# EAGLE board I2C_Breakout_Block-Panel-v10 (EAGLE 6.6.0), part 1 of 3
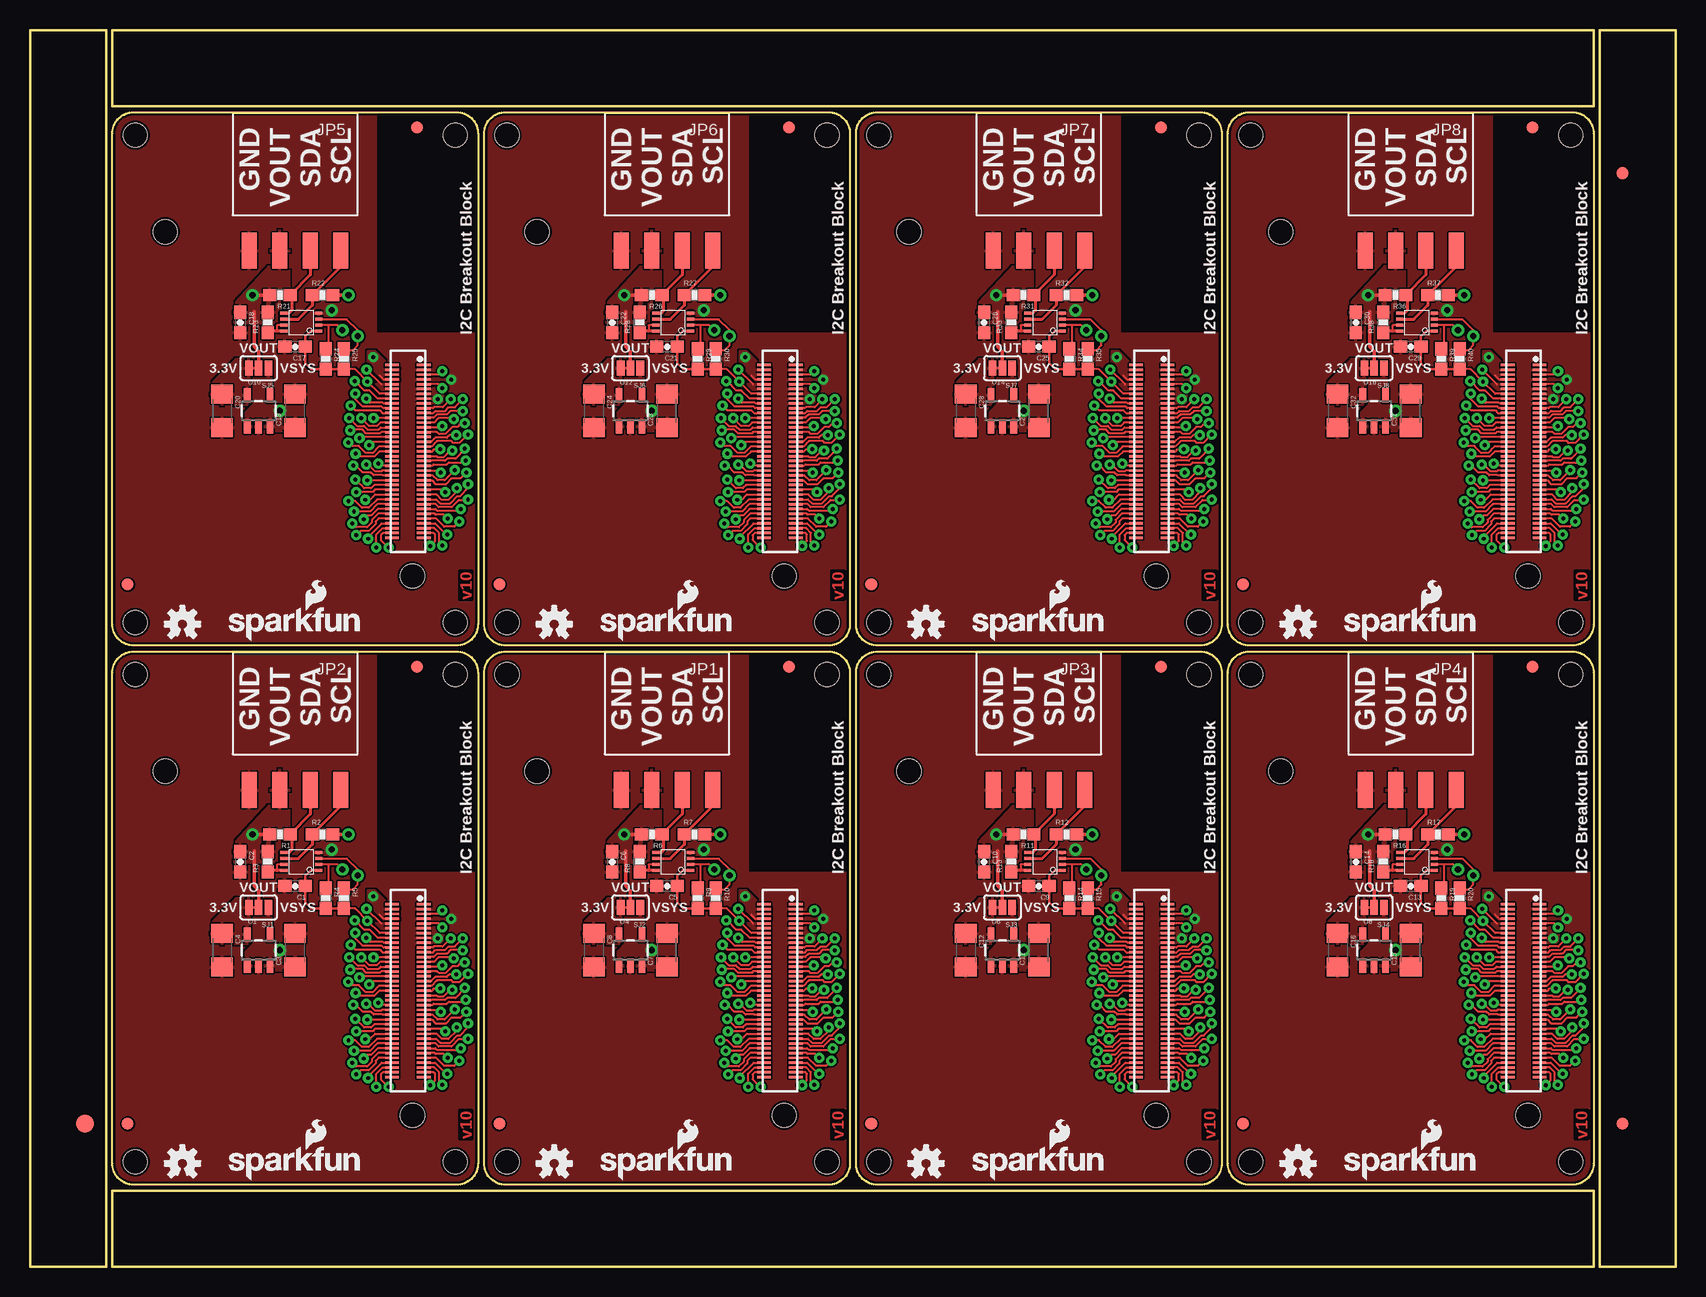
[diagram p0: board, top side]
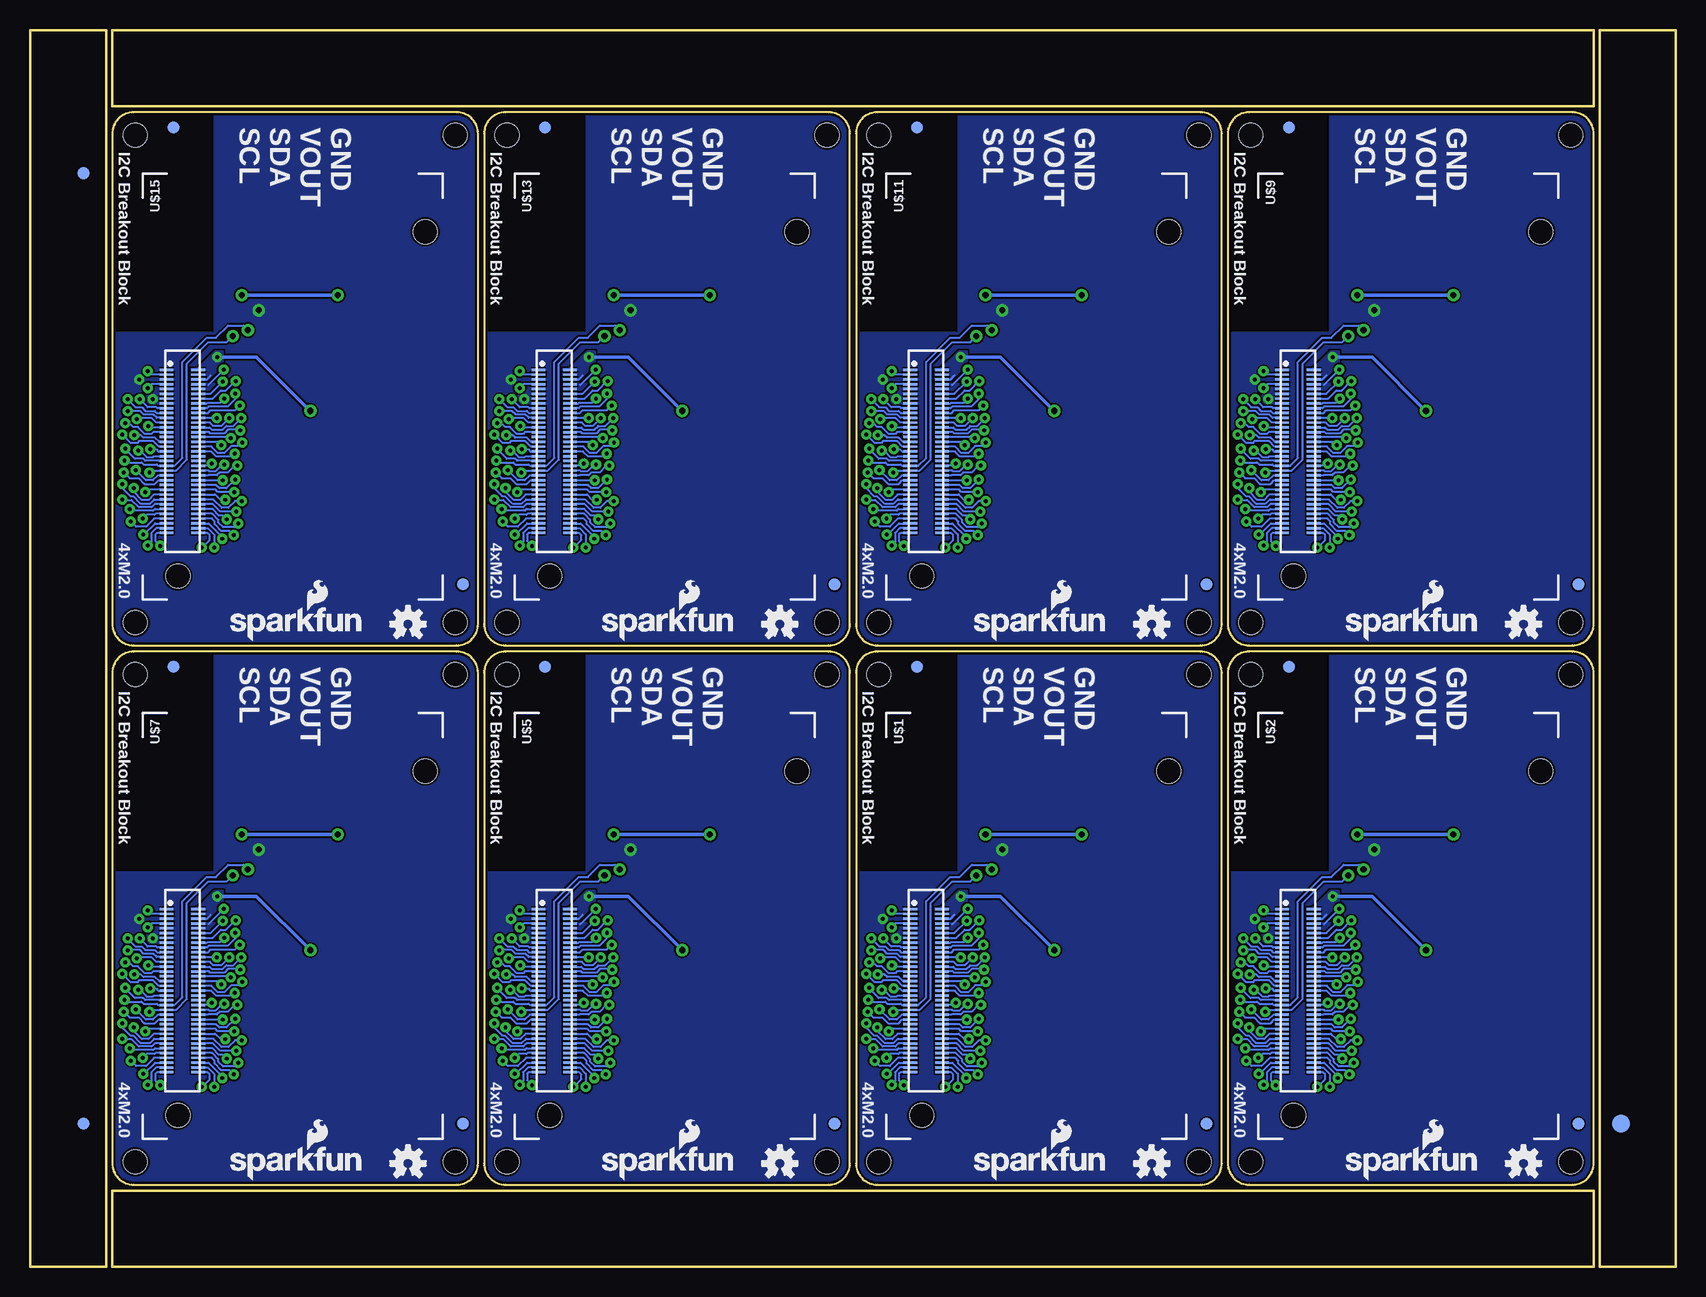
[diagram p1: board, bottom side, seen from below]

Size 137.16 x 103.12 mm. Coordinates in mm from the lower left corner, seen from the top.
Outline: 6.35,79.25 6.35,0 0,0 0,29.72
Outline: 137.16,79.25 137.16,0 130.81,0 130.81,29.72
Outline: 130.81,23.88 130.81,103.12 137.16,103.12 137.16,73.41
Outline: 0,23.88 0,103.12 6.35,103.12 6.35,73.41
Outline: 37.34,49.53 37.34,8.64 arc-90 35.56,6.86 8.64,6.86 arc-90 6.86,8.64 6.86,49.53 arc-90 8.64,51.31 35.56,51.31 arc-90 37.34,49.53
Outline: 68.33,49.53 68.33,8.64 arc-90 66.55,6.86 39.62,6.86 arc-90 37.85,8.64 37.85,49.53 arc-90 39.62,51.31 66.55,51.31 arc-90 68.33,49.53
Outline: 99.31,49.53 99.31,8.64 arc-90 97.54,6.86 70.61,6.86 arc-90 68.83,8.64 68.83,49.53 arc-90 70.61,51.31 97.54,51.31 arc-90 99.31,49.53
Outline: 130.3,49.53 130.3,8.64 arc-90 128.52,6.86 101.6,6.86 arc-90 99.82,8.64 99.82,49.53 arc-90 101.6,51.31 128.52,51.31 arc-90 130.3,49.53
Outline: 37.34,94.49 37.34,53.59 arc-90 35.56,51.82 8.64,51.82 arc-90 6.86,53.59 6.86,94.49 arc-90 8.64,96.27 35.56,96.27 arc-90 37.34,94.49
Outline: 68.33,94.49 68.33,53.59 arc-90 66.55,51.82 39.62,51.82 arc-90 37.85,53.59 37.85,94.49 arc-90 39.62,96.27 66.55,96.27 arc-90 68.33,94.49
Outline: 99.31,94.49 99.31,53.59 arc-90 97.54,51.82 70.61,51.82 arc-90 68.83,53.59 68.83,94.49 arc-90 70.61,96.27 97.54,96.27 arc-90 99.31,94.49
Outline: 130.3,94.49 130.3,53.59 arc-90 128.52,51.82 101.6,51.82 arc-90 99.82,53.59 99.82,94.49 arc-90 101.6,96.27 128.52,96.27 arc-90 130.3,94.49
Outline: 6.86,0 130.3,0 130.3,6.35 6.86,6.35 6.86,0
Outline: 130.3,103.12 6.86,103.12 6.86,96.77 130.3,96.77 130.3,103.12
Copper layers (1*16): Top 0.035mm / dielectric 1.5mm / Bottom 0.035mm
Design rules "SparkFun-2-layer *": minimum track width 6mil, minimum drill 13mil, track to track 6mil, track to pad 6mil, pad to pad 6mil, via to via 6mil, smd to smd 6mil, copper to edge 8mil, drill to drill 8mil, minimum pad ring 12mil, minimum via ring 10mil, stop-mask expansion 4mil, vias tented up to drill 20mil, thermal gap 6mil
Holes 2 mm at 35.43,8.76 8.76,8.76 8.76,49.4 35.43,49.4 66.42,8.76 39.75,8.76 39.75,49.4 66.42,49.4 97.41,8.76 70.74,8.76 70.74,49.4 97.41,49.4 128.4,8.76 101.73,8.76 101.73,49.4 128.4,49.4 35.43,53.72 8.76,53.72 8.76,94.36 35.43,94.36 66.42,53.72 39.75,53.72 39.75,94.36 66.42,94.36 97.41,53.72 70.74,53.72 70.74,94.36 97.41,94.36 128.4,53.72 101.73,53.72 101.73,94.36 128.4,94.36
tRestrict: area 29,33 to 37.3,51.3; area 59.9,33 to 68.3,51.3; area 90.9,33 to 99.3,51.3; area 121.9,33 to 130.3,51.3; area 29,78 to 37.3,96.3; area 59.9,78 to 68.3,96.3; area 90.9,78 to 99.3,96.3; area 121.9,78 to 130.3,96.3; 8 lines
bRestrict: area 29,33 to 37.3,51.3; area 59.9,33 to 68.3,51.3; area 90.9,33 to 99.3,51.3; area 121.9,33 to 130.3,51.3; area 29,78 to 37.3,96.3; area 59.9,78 to 68.3,96.3; area 90.9,78 to 99.3,96.3; area 121.9,78 to 130.3,96.3

## Footprints (pad centres in the part's own frame; a part is rotated, then mirrored left to right if it is on the bottom)
0603-CAP = smd 1.1 x 1: 1 -0.85,0; 2 0.85,0
1206 = smd 1.6 x 1.8: 1 -1.4,0; 2 1.4,0
FIDUCIAL-1.5X3 = smd 1.5 x 1.5: 1 0,0
FIDUCIAL-1X2 = smd 1 x 1: 1 0,0
1X04_SMD_RA_FEMALE = smd 1.25 x 3: 1 -3.81,7.225; 2 -1.27,7.225; 3 1.27,7.225; 4 3.81,7.225
0603-RES = smd 1.1 x 1: 1 -0.85,0; 2 0.85,0
PAD-JUMPER-3-2OF3_NC_BY_TRACE_YES_SILK_FULL_BOX = smd 0.635 x 1.27: 1 -0.813,0; 2 0,0; 3 0.813,0
SOT23-5 = smd 0.55 x 1.2: 1 -0.95,-1.3; 2 0,-1.3; 3 0.95,-1.3; 4 0.95,1.3; 5 -0.95,1.3
PCA9306DC-1:1 = smd 0.25 x 0.602: 1 -0.73,-1.446; 2 -0.23,-1.446; 3 0.27,-1.446; 4 0.77,-1.446; 5 0.77,1.431; 6 0.27,1.431; 7 -0.23,1.431; 8 -0.73,1.431
EDISON_DAUGHTER = smd 1.14 x 0.2: 1 1.98,19.17; 2 4.62,19.17; 3 1.98,18.77; 4 4.62,18.77; 5 1.98,18.37; 6 4.62,18.37; 7 1.98,17.97; 8 4.62,17.97; 9 1.98,17.57; 10 4.62,17.57; 11 1.98,17.17; 12 4.62,17.17; 13 1.98,16.77; 14 4.62,16.77; 15 1.98,16.37; 16 4.62,16.37; 17 1.98,15.97; 18 4.62,15.97; 19 1.98,15.57; 20 4.62,15.57; 21 1.98,15.17; 22 4.62,15.17; 23 1.98,14.77; 24 4.62,14.77; 25 1.98,14.37; 26 4.62,14.37; 27 1.98,13.97; 28 4.62,13.97; 29 1.98,13.57; 30 4.62,13.57; 31 1.98,13.17; 32 4.62,13.17; 33 1.98,12.77; 34 4.62,12.77; 35 1.98,12.37; 36 4.62,12.37; 37 1.98,11.97; 38 4.62,11.97; 39 1.98,11.57; 40 4.62,11.57; 41 1.98,11.17; 42 4.62,11.17; 43 1.98,10.77; 44 4.62,10.77; 45 1.98,10.37; 46 4.62,10.37; 47 1.98,9.97; 48 4.62,9.97; 49 1.98,9.57; 50 4.62,9.57; 51 1.98,9.17; 52 4.62,9.17; 53 1.98,8.77; 54 4.62,8.77; 55 1.98,8.37; 56 4.62,8.37; 57 1.98,7.97; 58 4.62,7.97; 59 1.98,7.57; 60 4.62,7.57; 61 1.98,7.17; 62 4.62,7.17; 63 1.98,6.77; 64 4.62,6.77; 65 1.98,6.37; 66 4.62,6.37; 67 1.98,5.97; 68 4.62,5.97; 69 1.98,5.57; 70 4.62,5.57 | hole 2: 23.53,30.67; 2.93,1.98
DF40C-70DP-0.4(51) = smd 0.2 x 1.14 bottom: 1 6.8,1.32; 2 6.8,-1.32; 3 6.4,1.32; 4 6.4,-1.32; 5 6,1.32; 6 6,-1.32; 7 5.6,1.32; 8 5.6,-1.32; 9 5.2,1.32; 10 5.2,-1.32; 11 4.8,1.32; 12 4.8,-1.32; 13 4.4,1.32; 14 4.4,-1.32; 15 4,1.32; 16 4,-1.32; 17 3.6,1.32; 18 3.6,-1.32; 19 3.2,1.32; 20 3.2,-1.32; 21 2.8,1.32; 22 2.8,-1.32; 23 2.4,1.32; 24 2.4,-1.32; 25 2,1.32; 26 2,-1.32; 27 1.6,1.32; 28 1.6,-1.32; 29 1.2,1.32; 30 1.2,-1.32; 31 0.8,1.32; 32 0.8,-1.32; 33 0.4,1.32; 34 0.4,-1.32; 35 0,1.32; 36 0,-1.32; 37 -0.4,1.32; 38 -0.4,-1.32; 39 -0.8,1.32; 40 -0.8,-1.32; 41 -1.2,1.32; 42 -1.2,-1.32; 43 -1.6,1.32; 44 -1.6,-1.32; 45 -2,1.32; 46 -2,-1.32; 47 -2.4,1.32; 48 -2.4,-1.32; 49 -2.8,1.32; 50 -2.8,-1.32; 51 -3.2,1.32; 52 -3.2,-1.32; 53 -3.6,1.32; 54 -3.6,-1.32; 55 -4,1.32; 56 -4,-1.32; 57 -4.4,1.32; 58 -4.4,-1.32; 59 -4.8,1.32; 60 -4.8,-1.32; 61 -5.2,1.32; 62 -5.2,-1.32; 63 -5.6,1.32; 64 -5.6,-1.32; 65 -6,1.32; 66 -6,-1.32; 67 -6.4,1.32; 68 -6.4,-1.32; 69 -6.8,1.32; 70 -6.8,-1.32; NC1 7.2,1.32; NC2 7.2,-1.32; NC3 -7.2,-1.32; NC4 -7.2,1.32

## Placement (x,y rotation side)
C1  0.1uF  [0603-CAP]  22.1,31.75 180 top
C2  0.1uF  [0603-CAP]  17.53,33.78 270 top
C3  10uF  [1206]  22.1,26.42 90 top
C4  10uF  [1206]  16,26.42 270 top
C5  0.1uF  [0603-CAP]  53.09,31.75 180 top
C6  0.1uF  [0603-CAP]  48.51,33.78 270 top
C7  10uF  [1206]  53.09,26.42 90 top
C8  10uF  [1206]  46.99,26.42 270 top
C9  0.1uF  [0603-CAP]  84.07,31.75 180 top
C10  0.1uF  [0603-CAP]  79.5,33.78 270 top
C11  10uF  [1206]  84.07,26.42 90 top
C12  10uF  [1206]  77.98,26.42 270 top
C13  0.1uF  [0603-CAP]  115.06,31.75 180 top
C14  0.1uF  [0603-CAP]  110.49,33.78 270 top
C15  10uF  [1206]  115.06,26.42 90 top
C16  10uF  [1206]  108.97,26.42 270 top
C17  0.1uF  [0603-CAP]  22.1,76.71 180 top
C18  0.1uF  [0603-CAP]  17.53,78.74 270 top
C19  10uF  [1206]  22.1,71.37 90 top
C20  10uF  [1206]  16,71.37 270 top
C21  0.1uF  [0603-CAP]  53.09,76.71 180 top
C22  0.1uF  [0603-CAP]  48.51,78.74 270 top
C23  10uF  [1206]  53.09,71.37 90 top
C24  10uF  [1206]  46.99,71.37 270 top
C25  0.1uF  [0603-CAP]  84.07,76.71 180 top
C26  0.1uF  [0603-CAP]  79.5,78.74 270 top
C27  10uF  [1206]  84.07,71.37 90 top
C28  10uF  [1206]  77.98,71.37 270 top
C29  0.1uF  [0603-CAP]  115.06,76.71 180 top
C30  0.1uF  [0603-CAP]  110.49,78.74 270 top
C31  10uF  [1206]  115.06,71.37 90 top
C32  10uF  [1206]  108.97,71.37 270 top
E$1  [FIDUCIAL-1.5X3]  4.57,11.94 0 top
E$2  [FIDUCIAL-1.5X3]  4.57,11.94 0 bottom
E$3  [FIDUCIAL-1X2]  132.72,91.19 180 bottom
E$4  [FIDUCIAL-1X2]  132.72,11.94 0 top
E$5  [FIDUCIAL-1X2]  132.72,91.19 180 top
E$6  [FIDUCIAL-1X2]  132.72,11.94 0 bottom
FID1  FIDUCIAL1X2  [FIDUCIAL-1X2]  32.26,50.04 0 bottom
FID2  FIDUCIAL1X2  [FIDUCIAL-1X2]  32.26,50.04 0 top
FID3  FIDUCIAL1X2  [FIDUCIAL-1X2]  8.13,11.94 0 bottom
FID4  FIDUCIAL1X2  [FIDUCIAL-1X2]  8.13,11.94 0 top
FID5  FIDUCIAL1X2  [FIDUCIAL-1X2]  63.25,50.04 0 bottom
FID6  FIDUCIAL1X2  [FIDUCIAL-1X2]  63.25,50.04 0 top
FID7  FIDUCIAL1X2  [FIDUCIAL-1X2]  39.12,11.94 0 bottom
FID8  FIDUCIAL1X2  [FIDUCIAL-1X2]  39.12,11.94 0 top
FID9  FIDUCIAL1X2  [FIDUCIAL-1X2]  94.23,50.04 0 bottom
FID10  FIDUCIAL1X2  [FIDUCIAL-1X2]  94.23,50.04 0 top
FID11  FIDUCIAL1X2  [FIDUCIAL-1X2]  70.1,11.94 0 bottom
FID12  FIDUCIAL1X2  [FIDUCIAL-1X2]  70.1,11.94 0 top
FID13  FIDUCIAL1X2  [FIDUCIAL-1X2]  125.22,50.04 0 bottom
FID14  FIDUCIAL1X2  [FIDUCIAL-1X2]  125.22,50.04 0 top
FID15  FIDUCIAL1X2  [FIDUCIAL-1X2]  101.09,11.94 0 bottom
FID16  FIDUCIAL1X2  [FIDUCIAL-1X2]  101.09,11.94 0 top
FID17  FIDUCIAL1X2  [FIDUCIAL-1X2]  32.26,95 0 bottom
FID18  FIDUCIAL1X2  [FIDUCIAL-1X2]  32.26,95 0 top
FID19  FIDUCIAL1X2  [FIDUCIAL-1X2]  8.13,56.9 0 bottom
FID20  FIDUCIAL1X2  [FIDUCIAL-1X2]  8.13,56.9 0 top
FID21  FIDUCIAL1X2  [FIDUCIAL-1X2]  63.25,95 0 bottom
FID22  FIDUCIAL1X2  [FIDUCIAL-1X2]  63.25,95 0 top
FID23  FIDUCIAL1X2  [FIDUCIAL-1X2]  39.12,56.9 0 bottom
FID24  FIDUCIAL1X2  [FIDUCIAL-1X2]  39.12,56.9 0 top
FID25  FIDUCIAL1X2  [FIDUCIAL-1X2]  94.23,95 0 bottom
FID26  FIDUCIAL1X2  [FIDUCIAL-1X2]  94.23,95 0 top
FID27  FIDUCIAL1X2  [FIDUCIAL-1X2]  70.1,56.9 0 bottom
FID28  FIDUCIAL1X2  [FIDUCIAL-1X2]  70.1,56.9 0 top
FID29  FIDUCIAL1X2  [FIDUCIAL-1X2]  125.22,95 0 bottom
FID30  FIDUCIAL1X2  [FIDUCIAL-1X2]  125.22,95 0 top
FID31  FIDUCIAL1X2  [FIDUCIAL-1X2]  101.09,56.9 0 bottom
FID32  FIDUCIAL1X2  [FIDUCIAL-1X2]  101.09,56.9 0 top
JP1  [1X04_SMD_RA_FEMALE]  53.09,46.99 180 top
JP2  [1X04_SMD_RA_FEMALE]  22.1,46.99 180 top
JP3  [1X04_SMD_RA_FEMALE]  84.07,46.99 180 top
JP4  [1X04_SMD_RA_FEMALE]  115.06,46.99 180 top
JP5  [1X04_SMD_RA_FEMALE]  22.1,91.95 180 top
JP6  [1X04_SMD_RA_FEMALE]  53.09,91.95 180 top
JP7  [1X04_SMD_RA_FEMALE]  84.07,91.95 180 top
JP8  [1X04_SMD_RA_FEMALE]  115.06,91.95 180 top
LOGO1  SFE_LOGO_NAME_FLAME.1_INCH  [SFE_LOGO_NAME_FLAME_.1]  16.13,7.11 0 top
LOGO2  OSHW-LOGOS  [OSHW-LOGO-S]  12.7,8.64 0 bottom
LOGO3  SFE_LOGO_NAME_FLAME.1_INCH  [SFE_LOGO_NAME_FLAME_.1]  27.94,7.11 0 bottom
LOGO4  OSHW-LOGOS  [OSHW-LOGO-S]  12.7,8.64 0 top
LOGO5  OSHW-LOGOS  [OSHW-LOGO-S]  43.69,8.64 0 bottom
LOGO6  SFE_LOGO_NAME_FLAME.1_INCH  [SFE_LOGO_NAME_FLAME_.1]  58.93,7.11 0 bottom
LOGO7  SFE_LOGO_NAME_FLAME.1_INCH  [SFE_LOGO_NAME_FLAME_.1]  47.12,7.11 0 top
LOGO8  OSHW-LOGOS  [OSHW-LOGO-S]  43.69,8.64 0 top
LOGO9  OSHW-LOGOS  [OSHW-LOGO-S]  74.68,8.64 0 bottom
LOGO10  SFE_LOGO_NAME_FLAME.1_INCH  [SFE_LOGO_NAME_FLAME_.1]  89.92,7.11 0 bottom
LOGO11  SFE_LOGO_NAME_FLAME.1_INCH  [SFE_LOGO_NAME_FLAME_.1]  78.11,7.11 0 top
LOGO12  OSHW-LOGOS  [OSHW-LOGO-S]  74.68,8.64 0 top
LOGO13  OSHW-LOGOS  [OSHW-LOGO-S]  105.66,8.64 0 bottom
LOGO14  SFE_LOGO_NAME_FLAME.1_INCH  [SFE_LOGO_NAME_FLAME_.1]  120.9,7.11 0 bottom
LOGO15  SFE_LOGO_NAME_FLAME.1_INCH  [SFE_LOGO_NAME_FLAME_.1]  109.09,7.11 0 top
LOGO16  OSHW-LOGOS  [OSHW-LOGO-S]  105.66,8.64 0 top
LOGO17  OSHW-LOGOS  [OSHW-LOGO-S]  12.7,53.59 0 bottom
LOGO18  SFE_LOGO_NAME_FLAME.1_INCH  [SFE_LOGO_NAME_FLAME_.1]  27.94,52.07 0 bottom
LOGO19  SFE_LOGO_NAME_FLAME.1_INCH  [SFE_LOGO_NAME_FLAME_.1]  16.13,52.07 0 top
LOGO20  OSHW-LOGOS  [OSHW-LOGO-S]  12.7,53.59 0 top
LOGO21  OSHW-LOGOS  [OSHW-LOGO-S]  43.69,53.59 0 bottom
LOGO22  SFE_LOGO_NAME_FLAME.1_INCH  [SFE_LOGO_NAME_FLAME_.1]  58.93,52.07 0 bottom
LOGO23  SFE_LOGO_NAME_FLAME.1_INCH  [SFE_LOGO_NAME_FLAME_.1]  47.12,52.07 0 top
LOGO24  OSHW-LOGOS  [OSHW-LOGO-S]  43.69,53.59 0 top
LOGO25  OSHW-LOGOS  [OSHW-LOGO-S]  74.68,53.59 0 bottom
LOGO26  SFE_LOGO_NAME_FLAME.1_INCH  [SFE_LOGO_NAME_FLAME_.1]  89.92,52.07 0 bottom
LOGO27  SFE_LOGO_NAME_FLAME.1_INCH  [SFE_LOGO_NAME_FLAME_.1]  78.11,52.07 0 top
LOGO28  OSHW-LOGOS  [OSHW-LOGO-S]  74.68,53.59 0 top
LOGO29  OSHW-LOGOS  [OSHW-LOGO-S]  105.66,53.59 0 bottom
LOGO30  SFE_LOGO_NAME_FLAME.1_INCH  [SFE_LOGO_NAME_FLAME_.1]  120.9,52.07 0 bottom
LOGO31  SFE_LOGO_NAME_FLAME.1_INCH  [SFE_LOGO_NAME_FLAME_.1]  109.09,52.07 0 top
LOGO32  OSHW-LOGOS  [OSHW-LOGO-S]  105.66,53.59 0 top
R1  10K  [0603-RES]  20.83,36.07 180 top
R2  10K  [0603-RES]  24.38,36.07 0 top
R3  200k  [0603-RES]  19.81,33.78 90 top
R4  DNP  [0603-RES]  24.64,30.73 270 top
R5  DNP  [0603-RES]  26.16,30.73 270 top
R6  10K  [0603-RES]  51.82,36.07 180 top
R7  10K  [0603-RES]  55.37,36.07 0 top
R8  200k  [0603-RES]  50.8,33.78 90 top
R9  DNP  [0603-RES]  55.63,30.73 270 top
R10  DNP  [0603-RES]  57.15,30.73 270 top
R11  10K  [0603-RES]  82.8,36.07 180 top
R12  10K  [0603-RES]  86.36,36.07 0 top
R13  200k  [0603-RES]  81.79,33.78 90 top
R14  DNP  [0603-RES]  86.61,30.73 270 top
R15  DNP  [0603-RES]  88.14,30.73 270 top
R16  10K  [0603-RES]  113.79,36.07 180 top
R17  10K  [0603-RES]  117.35,36.07 0 top
R18  200k  [0603-RES]  112.78,33.78 90 top
R19  DNP  [0603-RES]  117.6,30.73 270 top
R20  DNP  [0603-RES]  119.13,30.73 270 top
R21  10K  [0603-RES]  20.83,81.03 180 top
R22  10K  [0603-RES]  24.38,81.03 0 top
R23  200k  [0603-RES]  19.81,78.74 90 top
R24  DNP  [0603-RES]  24.64,75.69 270 top
R25  DNP  [0603-RES]  26.16,75.69 270 top
R26  10K  [0603-RES]  51.82,81.03 180 top
R27  10K  [0603-RES]  55.37,81.03 0 top
R28  200k  [0603-RES]  50.8,78.74 90 top
R29  DNP  [0603-RES]  55.63,75.69 270 top
R30  DNP  [0603-RES]  57.15,75.69 270 top
R31  10K  [0603-RES]  82.8,81.03 180 top
R32  10K  [0603-RES]  86.36,81.03 0 top
R33  200k  [0603-RES]  81.79,78.74 90 top
R34  DNP  [0603-RES]  86.61,75.69 270 top
R35  DNP  [0603-RES]  88.14,75.69 270 top
R36  10K  [0603-RES]  113.79,81.03 180 top
R37  10K  [0603-RES]  117.35,81.03 0 top
R38  200k  [0603-RES]  112.78,78.74 90 top
R39  DNP  [0603-RES]  117.6,75.69 270 top
R40  DNP  [0603-RES]  119.13,75.69 270 top
SJ1  Power Select  [PAD-JUMPER-3-2OF3_NC_BY_TRACE_YES_SILK_FULL_BOX]  19.05,29.97 180 top
SJ2  Power Select  [PAD-JUMPER-3-2OF3_NC_BY_TRACE_YES_SILK_FULL_BOX]  50.04,29.97 180 top
SJ3  Power Select  [PAD-JUMPER-3-2OF3_NC_BY_TRACE_YES_SILK_FULL_BOX]  81.03,29.97 180 top
SJ4  Power Select  [PAD-JUMPER-3-2OF3_NC_BY_TRACE_YES_SILK_FULL_BOX]  112.01,29.97 180 top
SJ5  Power Select  [PAD-JUMPER-3-2OF3_NC_BY_TRACE_YES_SILK_FULL_BOX]  19.05,74.93 180 top
SJ6  Power Select  [PAD-JUMPER-3-2OF3_NC_BY_TRACE_YES_SILK_FULL_BOX]  50.04,74.93 180 top
SJ7  Power Select  [PAD-JUMPER-3-2OF3_NC_BY_TRACE_YES_SILK_FULL_BOX]  81.03,74.93 180 top
SJ8  Power Select  [PAD-JUMPER-3-2OF3_NC_BY_TRACE_YES_SILK_FULL_BOX]  112.01,74.93 180 top
U1  MIC5205  [SOT23-5]  19.05,26.42 0 top
U2  PCA9306  [PCA9306DC-1:1]  22.61,33.78 90 top
U3  PCA9306  [PCA9306DC-1:1]  53.59,33.78 90 top
U4  MIC5205  [SOT23-5]  50.04,26.42 0 top
U5  PCA9306  [PCA9306DC-1:1]  84.58,33.78 90 top
U6  MIC5205  [SOT23-5]  81.03,26.42 0 top
U7  PCA9306  [PCA9306DC-1:1]  115.57,33.78 90 top
U8  MIC5205  [SOT23-5]  112.01,26.42 0 top
U9  PCA9306  [PCA9306DC-1:1]  22.61,78.74 90 top
U10  MIC5205  [SOT23-5]  19.05,71.37 0 top
U11  PCA9306  [PCA9306DC-1:1]  53.59,78.74 90 top
U12  MIC5205  [SOT23-5]  50.04,71.37 0 top
U13  PCA9306  [PCA9306DC-1:1]  84.58,78.74 90 top
U14  MIC5205  [SOT23-5]  81.03,71.37 0 top
U15  PCA9306  [PCA9306DC-1:1]  115.57,78.74 90 top
U16  MIC5205  [SOT23-5]  112.01,71.37 0 top
U$1  EDISON_CONNECTOR_FULLMOUNTING_HOLES  [EDISON_DAUGHTER]  65.79,10.67 0 bottom
U$2  EDISON_CONNECTOR_FULLMOUNTING_HOLES  [EDISON_DAUGHTER]  34.8,10.67 0 bottom
U$3  EDISON_CONNECTOR_FULLHEADER  [DF40C-70DP-0.4(51)]  31.5,23.04 90 bottom
U$4  EDISON_CONNECTOR_FULLHEADER  [DF40C-70DP-0.4(51)]  62.49,23.04 90 bottom
U$5  EDISON_CONNECTOR_FULLMOUNTING_HOLES  [EDISON_DAUGHTER]  96.77,10.67 0 bottom
U$6  EDISON_CONNECTOR_FULLHEADER  [DF40C-70DP-0.4(51)]  93.47,23.04 90 bottom
U$7  EDISON_CONNECTOR_FULLMOUNTING_HOLES  [EDISON_DAUGHTER]  127.76,10.67 0 bottom
U$8  EDISON_CONNECTOR_FULLHEADER  [DF40C-70DP-0.4(51)]  124.46,23.04 90 bottom
U$9  EDISON_CONNECTOR_FULLMOUNTING_HOLES  [EDISON_DAUGHTER]  34.8,55.63 0 bottom
U$10  EDISON_CONNECTOR_FULLHEADER  [DF40C-70DP-0.4(51)]  31.5,68 90 bottom
U$11  EDISON_CONNECTOR_FULLMOUNTING_HOLES  [EDISON_DAUGHTER]  65.79,55.63 0 bottom
U$12  EDISON_CONNECTOR_FULLHEADER  [DF40C-70DP-0.4(51)]  62.49,68 90 bottom
U$13  EDISON_CONNECTOR_FULLMOUNTING_HOLES  [EDISON_DAUGHTER]  96.77,55.63 0 bottom
U$14  EDISON_CONNECTOR_FULLHEADER  [DF40C-70DP-0.4(51)]  93.47,68 90 bottom
U$15  EDISON_CONNECTOR_FULLMOUNTING_HOLES  [EDISON_DAUGHTER]  127.76,55.63 0 bottom
U$16  EDISON_CONNECTOR_FULLHEADER  [DF40C-70DP-0.4(51)]  124.46,68 90 bottom

## Library data of the parts
C1 C2 C5 C6 C9 C10 C13 C14 C17 C18 C21 C22 C25 C26 C29 C30 = SparkFun-Capacitors; PROD_ID: CAP-00810
C3 C4 C7 C8 C11 C12 C15 C16 C19 C20 C23 C24 C27 C28 C31 C32 = SparkFun-Capacitors; PROD_ID: CAP-10057
E$1 E$2 = SparkFun-Retired
E$3-E$6 FID1-FID32 LOGO1-LOGO32 = SparkFun-Aesthetics
JP1-JP8 = SparkFun-Connectors
R1 R2 R6 R7 R11 R12 R16 R17 R21 R22 R26 R27 R31 R32 R36 R37 = SparkFun-Resistors; PROD_ID: RES-00824
R3 R8 R13 R18 R23 R28 R33 R38 = SparkFun-Resistors; PROD_ID: RES-09385
R4 R5 R9 R10 R14 R15 R19 R20 R24 R25 R29 R30 R34 R35 R39 R40 = SparkFun-Resistors; PROD_ID: RES-08272
SJ1-SJ8 = SparkFun-Passives
U1 U4 U6 U8 U10 U12 U14 U16 = SparkFun-PowerIC; PROD_ID: VREG-00822
U2 U3 U5 U7 U9 U11 U13 U15 = SparkFun-DigitalIC; PROD_ID: IC-10023
U$1-U$16 = Edison

## Nets
1.8V: C1.1 R4.2 R5.2 U2.1 U$2.12 U$3.12
1.8V1: C5.1 R9.2 R10.2 U3.1 U$1.12 U$4.12
1.8V2: C9.1 R14.2 R15.2 U5.1 U$5.12 U$6.12
1.8V3: C13.1 R19.2 R20.2 U7.1 U$7.12 U$8.12
1.8V4: C17.1 R24.2 R25.2 U9.1 U$9.12 U$10.12
1.8V5: C21.1 R29.2 R30.2 U11.1 U$11.12 U$12.12
1.8V6: C25.1 R34.2 R35.2 U13.1 U$13.12 U$14.12
1.8V7: C29.1 R39.2 R40.2 U15.1 U$15.12 U$16.12
3.3V: U$2.8 U$2.10 U$3.8 U$3.10
3.3V1: U$1.8 U$1.10 U$4.8 U$4.10
3.3V2: U$5.8 U$5.10 U$6.8 U$6.10
3.3V3: U$7.8 U$7.10 U$8.8 U$8.10
3.3V4: U$9.8 U$9.10 U$10.8 U$10.10
3.3V5: U$11.8 U$11.10 U$12.8 U$12.10
3.3V6: U$13.8 U$13.10 U$14.8 U$14.10
3.3V7: U$15.8 U$15.10 U$16.8 U$16.10
3.3V-REGULATED: C4.1 SJ1.3 U1.5
3.3V-REGULATED1: C8.1 SJ2.3 U4.5
3.3V-REGULATED2: C12.1 SJ3.3 U6.5
3.3V-REGULATED3: C16.1 SJ4.3 U8.5
3.3V-REGULATED4: C20.1 SJ5.3 U10.5
3.3V-REGULATED5: C24.1 SJ6.3 U12.5
3.3V-REGULATED6: C28.1 SJ7.3 U14.5
3.3V-REGULATED7: C32.1 SJ8.3 U16.5
DCIN: U$2.14 U$3.14
DCIN1: U$1.14 U$4.14
DCIN2: U$5.14 U$6.14
DCIN3: U$7.14 U$8.14
DCIN4: U$9.14 U$10.14
DCIN5: U$11.14 U$12.14
DCIN6: U$13.14 U$14.14
DCIN7: U$15.14 U$16.14
FAULT: U$2.19 U$3.19
FAULT1: U$1.19 U$4.19
FAULT2: U$5.19 U$6.19
FAULT3: U$7.19 U$8.19
FAULT4: U$9.19 U$10.19
FAULT5: U$11.19 U$12.19
FAULT6: U$13.19 U$14.19
FAULT7: U$15.19 U$16.19
FW_RCVR: U$2.69 U$3.69
FW_RCVR1: U$1.69 U$4.69
FW_RCVR2: U$5.69 U$6.69
FW_RCVR3: U$7.69 U$8.69
FW_RCVR4: U$9.69 U$10.69
FW_RCVR5: U$11.69 U$12.69
FW_RCVR6: U$13.69 U$14.69
FW_RCVR7: U$15.69 U$16.69
GND: C1.2 C2.2 C3.2 C4.2 JP2.4 U1.2 U2.4 U$2.1 U$2.5 U$2.9 U$2.11 U$2.13 U$2.15 U$3.1 U$3.5 U$3.9 U$3.11 U$3.13 U$3.15
GND1: C5.2 C6.2 C7.2 C8.2 JP1.4 U3.4 U4.2 U$1.1 U$1.5 U$1.9 U$1.11 U$1.13 U$1.15 U$4.1 U$4.5 U$4.9 U$4.11 U$4.13 U$4.15
GND2: C9.2 C10.2 C11.2 C12.2 JP3.4 U5.4 U6.2 U$5.1 U$5.5 U$5.9 U$5.11 U$5.13 U$5.15 U$6.1 U$6.5 U$6.9 U$6.11 U$6.13 U$6.15
GND3: C13.2 C14.2 C15.2 C16.2 JP4.4 U7.4 U8.2 U$7.1 U$7.5 U$7.9 U$7.11 U$7.13 U$7.15 U$8.1 U$8.5 U$8.9 U$8.11 U$8.13 U$8.15
GND4: C17.2 C18.2 C19.2 C20.2 JP5.4 U9.4 U10.2 U$9.1 U$9.5 U$9.9 U$9.11 U$9.13 U$9.15 U$10.1 U$10.5 U$10.9 U$10.11 U$10.13 U$10.15
GND5: C21.2 C22.2 C23.2 C24.2 JP6.4 U11.4 U12.2 U$11.1 U$11.5 U$11.9 U$11.11 U$11.13 U$11.15 U$12.1 U$12.5 U$12.9 U$12.11 U$12.13 U$12.15
GND6: C25.2 C26.2 C27.2 C28.2 JP7.4 U13.4 U14.2 U$13.1 U$13.5 U$13.9 U$13.11 U$13.13 U$13.15 U$14.1 U$14.5 U$14.9 U$14.11 U$14.13 U$14.15
GND7: C29.2 C30.2 C31.2 C32.2 JP8.4 U15.4 U16.2 U$15.1 U$15.5 U$15.9 U$15.11 U$15.13 U$15.15 U$16.1 U$16.5 U$16.9 U$16.11 U$16.13 U$16.15
GP1: U$1.48 U$4.48
GP2: U$1.42 U$4.42
GP3: U$1.34 U$4.34
GP4: U$1.32 U$4.32
GP5: U$1.30 U$4.30
GP6: U$1.28 U$4.28
GP7: U$1.26 U$4.26
GP8: U$1.25 U$4.25
GP9: U$1.24 U$4.24
GP10: U$5.48 U$6.48
GP11: U$5.42 U$6.42
GP12: U$5.34 U$6.34
GP12_PWM0: U$2.35 U$3.35
GP12_PWM1: U$1.35 U$4.35
GP12_PWM2: U$5.35 U$6.35
GP12_PWM3: U$7.35 U$8.35
GP12_PWM4: U$9.35 U$10.35
GP12_PWM5: U$11.35 U$12.35
GP12_PWM6: U$13.35 U$14.35
GP12_PWM7: U$15.35 U$16.35
GP13: U$5.32 U$6.32
GP13_PWM1: U$2.33 U$3.33
GP13_PWM2: U$1.33 U$4.33
GP13_PWM3: U$5.33 U$6.33
GP13_PWM4: U$7.33 U$8.33
GP13_PWM5: U$9.33 U$10.33
GP13_PWM6: U$11.33 U$12.33
GP13_PWM7: U$13.33 U$14.33
GP13_PWM8: U$15.33 U$16.33
GP14: U$2.48 U$3.48
GP15: U$2.42 U$3.42
GP16: U$5.30 U$6.30
GP17: U$5.28 U$6.28
GP18: U$5.26 U$6.26
GP19: U$5.25 U$6.25
GP19_I2C_1_SCL: R4.1 U2.2 U$2.41 U$3.41
GP19_I2C_1_SCL1: R9.1 U3.2 U$1.41 U$4.41
GP19_I2C_1_SCL2: R14.1 U5.2 U$5.41 U$6.41
GP19_I2C_1_SCL3: R19.1 U7.2 U$7.41 U$8.41
GP19_I2C_1_SCL4: R24.1 U9.2 U$9.41 U$10.41
GP19_I2C_1_SCL5: R29.1 U11.2 U$11.41 U$12.41
GP19_I2C_1_SCL6: R34.1 U13.2 U$13.41 U$14.41
GP19_I2C_1_SCL7: R39.1 U15.2 U$15.41 U$16.41
GP20: U$5.24 U$6.24
GP20_I2C_1_SDA: R5.1 U2.3 U$2.43 U$3.43
GP20_I2C_1_SDA1: R10.1 U3.3 U$1.43 U$4.43
GP20_I2C_1_SDA2: R15.1 U5.3 U$5.43 U$6.43
GP20_I2C_1_SDA3: R20.1 U7.3 U$7.43 U$8.43
GP20_I2C_1_SDA4: R25.1 U9.3 U$9.43 U$10.43
GP20_I2C_1_SDA5: R30.1 U11.3 U$11.43 U$12.43
GP20_I2C_1_SDA6: R35.1 U13.3 U$13.43 U$14.43
GP20_I2C_1_SDA7: R40.1 U15.3 U$15.43 U$16.43
GP21: U$7.48 U$8.48
GP22: U$7.42 U$8.42
GP23: U$7.34 U$8.34
GP24: U$7.32 U$8.32
GP25: U$7.30 U$8.30
GP26: U$7.28 U$8.28
GP27: U$7.26 U$8.26
GP27_I2C_6_SCL: U$2.45 U$3.45
GP27_I2C_6_SCL1: U$1.45 U$4.45
GP27_I2C_6_SCL2: U$5.45 U$6.45
GP27_I2C_6_SCL3: U$7.45 U$8.45
GP27_I2C_6_SCL4: U$9.45 U$10.45
GP27_I2C_6_SCL5: U$11.45 U$12.45
GP27_I2C_6_SCL6: U$13.45 U$14.45
GP27_I2C_6_SCL7: U$15.45 U$16.45
GP28: U$7.25 U$8.25
GP28_I2C_6_SDA: U$2.47 U$3.47
GP28_I2C_6_SDA1: U$1.47 U$4.47
GP28_I2C_6_SDA2: U$5.47 U$6.47
GP28_I2C_6_SDA3: U$7.47 U$8.47
GP28_I2C_6_SDA4: U$9.47 U$10.47
GP28_I2C_6_SDA5: U$11.47 U$12.47
GP28_I2C_6_SDA6: U$13.47 U$14.47
GP28_I2C_6_SDA7: U$15.47 U$16.47
GP29: U$7.24 U$8.24
GP30: U$9.48 U$10.48
GP31: U$9.42 U$10.42
GP32: U$9.34 U$10.34
GP33: U$9.32 U$10.32
GP34: U$9.30 U$10.30
GP35: U$9.28 U$10.28
GP36: U$9.26 U$10.26
GP37: U$9.25 U$10.25
GP38: U$9.24 U$10.24
GP39: U$11.48 U$12.48
GP40: U$11.42 U$12.42
GP40_I2S_2_CLK: U$2.52 U$3.52
GP40_I2S_2_CLK1: U$1.52 U$4.52
GP40_I2S_2_CLK2: U$5.52 U$6.52
GP40_I2S_2_CLK3: U$7.52 U$8.52
GP40_I2S_2_CLK4: U$9.52 U$10.52
GP40_I2S_2_CLK5: U$11.52 U$12.52
GP40_I2S_2_CLK6: U$13.52 U$14.52
GP40_I2S_2_CLK7: U$15.52 U$16.52
GP41: U$11.34 U$12.34
GP41_I2S_2_FS: U$2.54 U$3.54
GP41_I2S_2_FS1: U$1.54 U$4.54
GP41_I2S_2_FS2: U$5.54 U$6.54
GP41_I2S_2_FS3: U$7.54 U$8.54
GP41_I2S_2_FS4: U$9.54 U$10.54
GP41_I2S_2_FS5: U$11.54 U$12.54
GP41_I2S_2_FS6: U$13.54 U$14.54
GP41_I2S_2_FS7: U$15.54 U$16.54
GP42: U$11.32 U$12.32
GP42_I2S_2_RXD: U$2.50 U$3.50
GP42_I2S_2_RXD1: U$1.50 U$4.50
GP42_I2S_2_RXD2: U$5.50 U$6.50
GP42_I2S_2_RXD3: U$7.50 U$8.50
GP42_I2S_2_RXD4: U$9.50 U$10.50
GP42_I2S_2_RXD5: U$11.50 U$12.50
GP42_I2S_2_RXD6: U$13.50 U$14.50
GP42_I2S_2_RXD7: U$15.50 U$16.50
GP43: U$11.30 U$12.30
GP43_I2S_2_TXD: U$2.56 U$3.56
GP43_I2S_2_TXD1: U$1.56 U$4.56
GP43_I2S_2_TXD2: U$5.56 U$6.56
GP43_I2S_2_TXD3: U$7.56 U$8.56
GP43_I2S_2_TXD4: U$9.56 U$10.56
GP43_I2S_2_TXD5: U$11.56 U$12.56
GP43_I2S_2_TXD6: U$13.56 U$14.56
GP43_I2S_2_TXD7: U$15.56 U$16.56
GP44: U$2.24 U$3.24
GP45: U$2.26 U$3.26
GP46: U$2.28 U$3.28
GP47: U$2.30 U$3.30
GP48: U$2.32 U$3.32
GP49: U$2.34 U$3.34
GP50: U$11.28 U$12.28
GP51: U$11.26 U$12.26
GP52: U$11.25 U$12.25
GP53: U$11.24 U$12.24
GP54: U$13.48 U$14.48
GP55: U$13.42 U$14.42
GP56: U$13.34 U$14.34
GP57: U$13.32 U$14.32
GP58: U$13.30 U$14.30
GP59: U$13.28 U$14.28
GP60: U$13.26 U$14.26
GP61: U$13.25 U$14.25
GP62: U$13.24 U$14.24
GP63: U$15.48 U$16.48
GP64: U$15.42 U$16.42
GP65: U$15.34 U$16.34
GP66: U$15.32 U$16.32
GP67: U$15.30 U$16.30
GP68: U$15.28 U$16.28
GP69: U$15.26 U$16.26
GP70: U$15.25 U$16.25
GP71: U$15.24 U$16.24
GP77_SD_0_CD#: U$2.60 U$3.60
GP77_SD_0_CD#1: U$1.60 U$4.60
GP77_SD_0_CD#2: U$5.60 U$6.60
GP77_SD_0_CD#3: U$7.60 U$8.60
GP77_SD_0_CD#4: U$9.60 U$10.60
GP77_SD_0_CD#5: U$11.60 U$12.60
GP77_SD_0_CD#6: U$13.60 U$14.60
GP77_SD_0_CD#7: U$15.60 U$16.60
GP78_SD_0_CLK: U$2.58 U$3.58
GP78_SD_0_CLK1: U$1.58 U$4.58
GP78_SD_0_CLK2: U$5.58 U$6.58
GP78_SD_0_CLK3: U$7.58 U$8.58
GP78_SD_0_CLK4: U$9.58 U$10.58
GP78_SD_0_CLK5: U$11.58 U$12.58
GP78_SD_0_CLK6: U$13.58 U$14.58
GP78_SD_0_CLK7: U$15.58 U$16.58
GP79_SD_0_CMD: U$2.62 U$3.62
GP79_SD_0_CMD1: U$1.62 U$4.62
GP79_SD_0_CMD2: U$5.62 U$6.62
GP79_SD_0_CMD3: U$7.62 U$8.62
GP79_SD_0_CMD4: U$9.62 U$10.62
GP79_SD_0_CMD5: U$11.62 U$12.62
GP79_SD_0_CMD6: U$13.62 U$14.62
GP79_SD_0_CMD7: U$15.62 U$16.62
GP80_SD_0_DAT0: U$2.66 U$3.66
GP80_SD_0_DAT1: U$1.66 U$4.66
GP80_SD_0_DAT2: U$5.66 U$6.66
GP80_SD_0_DAT3: U$7.66 U$8.66
GP80_SD_0_DAT4: U$9.66 U$10.66
GP80_SD_0_DAT5: U$11.66 U$12.66
GP80_SD_0_DAT6: U$13.66 U$14.66
GP80_SD_0_DAT7: U$15.66 U$16.66
GP81_SD_0_DAT1: U$2.70 U$3.70
GP81_SD_0_DAT2: U$1.70 U$4.70
GP81_SD_0_DAT3: U$5.70 U$6.70
GP81_SD_0_DAT4: U$7.70 U$8.70
GP81_SD_0_DAT5: U$9.70 U$10.70
GP81_SD_0_DAT6: U$11.70 U$12.70
GP81_SD_0_DAT7: U$13.70 U$14.70
GP81_SD_0_DAT8: U$15.70 U$16.70
GP82_SD_0_DAT1: U$1.64 U$4.64
GP82_SD_0_DAT2: U$2.64 U$3.64
GP82_SD_0_DAT3: U$5.64 U$6.64
GP82_SD_0_DAT4: U$7.64 U$8.64
GP82_SD_0_DAT5: U$9.64 U$10.64
GP82_SD_0_DAT6: U$11.64 U$12.64
GP82_SD_0_DAT7: U$13.64 U$14.64
GP82_SD_0_DAT8: U$15.64 U$16.64
GP83_SD_0_DAT1: U$1.68 U$4.68
GP83_SD_0_DAT2: U$5.68 U$6.68
GP83_SD_0_DAT3: U$2.68 U$3.68
GP83_SD_0_DAT4: U$7.68 U$8.68
GP83_SD_0_DAT5: U$9.68 U$10.68
GP83_SD_0_DAT6: U$11.68 U$12.68
GP83_SD_0_DAT7: U$13.68 U$14.68
GP83_SD_0_DAT8: U$15.68 U$16.68
GP84_SD_CLK_FB: U$2.44 U$3.44
GP84_SD_CLK_FB1: U$1.44 U$4.44
GP84_SD_CLK_FB2: U$5.44 U$6.44
GP84_SD_CLK_FB3: U$7.44 U$8.44
GP84_SD_CLK_FB4: U$9.44 U$10.44
GP84_SD_CLK_FB5: U$11.44 U$12.44
GP84_SD_CLK_FB6: U$13.44 U$14.44
GP84_SD_CLK_FB7: U$15.44 U$16.44
GP109_SPI_2_CLK: U$2.55 U$3.55
GP109_SPI_2_CLK1: U$1.55 U$4.55
GP109_SPI_2_CLK2: U$5.55 U$6.55
GP109_SPI_2_CLK3: U$7.55 U$8.55
GP109_SPI_2_CLK4: U$9.55 U$10.55
GP109_SPI_2_CLK5: U$11.55 U$12.55
GP109_SPI_2_CLK6: U$13.55 U$14.55
GP109_SPI_2_CLK7: U$15.55 U$16.55
GP110_SPI_2_FS0: U$2.53 U$3.53
GP110_SPI_2_FS1: U$1.53 U$4.53
GP110_SPI_2_FS2: U$5.53 U$6.53
GP110_SPI_2_FS3: U$7.53 U$8.53
GP110_SPI_2_FS4: U$9.53 U$10.53
GP110_SPI_2_FS5: U$11.53 U$12.53
GP110_SPI_2_FS6: U$13.53 U$14.53
GP110_SPI_2_FS7: U$15.53 U$16.53
GP111_SPI_2_FS1: U$2.51 U$3.51
GP111_SPI_2_FS2: U$1.51 U$4.51
GP111_SPI_2_FS3: U$5.51 U$6.51
GP111_SPI_2_FS4: U$7.51 U$8.51
GP111_SPI_2_FS5: U$9.51 U$10.51
GP111_SPI_2_FS6: U$11.51 U$12.51
GP111_SPI_2_FS7: U$13.51 U$14.51
GP111_SPI_2_FS8: U$15.51 U$16.51
GP114_SPI_2_RXD: U$2.59 U$3.59
GP114_SPI_2_RXD1: U$1.59 U$4.59
GP114_SPI_2_RXD2: U$5.59 U$6.59
GP114_SPI_2_RXD3: U$7.59 U$8.59
GP114_SPI_2_RXD4: U$9.59 U$10.59
GP114_SPI_2_RXD5: U$11.59 U$12.59
GP114_SPI_2_RXD6: U$13.59 U$14.59
GP114_SPI_2_RXD7: U$15.59 U$16.59
GP115_SPI_2_TXD: U$2.57 U$3.57
GP115_SPI_2_TXD1: U$1.57 U$4.57
GP115_SPI_2_TXD2: U$5.57 U$6.57
GP115_SPI_2_TXD3: U$7.57 U$8.57
GP115_SPI_2_TXD4: U$9.57 U$10.57
GP115_SPI_2_TXD5: U$11.57 U$12.57
GP115_SPI_2_TXD6: U$13.57 U$14.57
GP115_SPI_2_TXD7: U$15.57 U$16.57
GP128_UART_1_CTS: U$2.65 U$3.65
GP128_UART_1_CTS1: U$1.65 U$4.65
GP128_UART_1_CTS2: U$5.65 U$6.65
GP128_UART_1_CTS3: U$7.65 U$8.65
GP128_UART_1_CTS4: U$9.65 U$10.65
GP128_UART_1_CTS5: U$11.65 U$12.65
GP128_UART_1_CTS6: U$13.65 U$14.65
GP128_UART_1_CTS7: U$15.65 U$16.65
GP129_UART_1_RTS: U$2.63 U$3.63
GP129_UART_1_RTS1: U$1.63 U$4.63
GP129_UART_1_RTS2: U$5.63 U$6.63
GP129_UART_1_RTS3: U$7.63 U$8.63
GP129_UART_1_RTS4: U$9.63 U$10.63
GP129_UART_1_RTS5: U$11.63 U$12.63
GP129_UART_1_RTS6: U$13.63 U$14.63
GP129_UART_1_RTS7: U$15.63 U$16.63
GP130_UART_1_RX: U$2.61 U$3.61
GP130_UART_1_RX1: U$1.61 U$4.61
GP130_UART_1_RX2: U$5.61 U$6.61
GP130_UART_1_RX3: U$7.61 U$8.61
GP130_UART_1_RX4: U$9.61 U$10.61
GP130_UART_1_RX5: U$11.61 U$12.61
GP130_UART_1_RX6: U$13.61 U$14.61
GP130_UART_1_RX7: U$15.61 U$16.61
GP131_UART_1_TX: U$2.46 U$3.46
GP131_UART_1_TX1: U$1.46 U$4.46
GP131_UART_1_TX2: U$5.46 U$6.46
GP131_UART_1_TX3: U$7.46 U$8.46
GP131_UART_1_TX4: U$9.46 U$10.46
GP131_UART_1_TX5: U$11.46 U$12.46
GP131_UART_1_TX6: U$13.46 U$14.46
GP131_UART_1_TX7: U$15.46 U$16.46
GP134_UART_2_RX: U$2.22 U$3.22
GP134_UART_2_RX1: U$1.22 U$4.22
GP134_UART_2_RX2: U$5.22 U$6.22
GP134_UART_2_RX3: U$7.22 U$8.22
GP134_UART_2_RX4: U$9.22 U$10.22
GP134_UART_2_RX5: U$11.22 U$12.22
GP134_UART_2_RX6: U$13.22 U$14.22
GP134_UART_2_RX7: U$15.22 U$16.22
GP135_UART_2_TX: U$2.27 U$3.27
GP135_UART_2_TX1: U$1.27 U$4.27
GP135_UART_2_TX2: U$5.27 U$6.27
GP135_UART_2_TX3: U$7.27 U$8.27
GP135_UART_2_TX4: U$9.27 U$10.27
GP135_UART_2_TX5: U$11.27 U$12.27
GP135_UART_2_TX6: U$13.27 U$14.27
GP135_UART_2_TX7: U$15.27 U$16.27
GP165: U$2.25 U$3.25
GP182_PWM1: U$1.37 U$4.37
GP182_PWM2: U$2.37 U$3.37
GP182_PWM3: U$5.37 U$6.37
GP182_PWM4: U$7.37 U$8.37
GP182_PWM5: U$9.37 U$10.37
GP182_PWM6: U$11.37 U$12.37
GP182_PWM7: U$13.37 U$14.37
GP182_PWM8: U$15.37 U$16.37
GP183_PWM1: U$1.39 U$4.39
GP183_PWM2: U$5.39 U$6.39
GP183_PWM3: U$2.39 U$3.39
GP183_PWM4: U$7.39 U$8.39
GP183_PWM5: U$9.39 U$10.39
GP183_PWM6: U$11.39 U$12.39
GP183_PWM7: U$13.39 U$14.39
GP183_PWM8: U$15.39 U$16.39
HV_SCL: JP2.1 R2.1 U2.6
HV_SCL1: JP1.1 R7.1 U3.6
HV_SCL2: JP3.1 R12.1 U5.6
HV_SCL3: JP4.1 R17.1 U7.6
HV_SCL4: JP5.1 R22.1 U9.6
HV_SCL5: JP6.1 R27.1 U11.6
HV_SCL6: JP7.1 R32.1 U13.6
HV_SCL7: JP8.1 R37.1 U15.6
HV_SDA: JP2.2 R1.1 U2.5
HV_SDA1: JP1.2 R6.1 U3.5
HV_SDA2: JP3.2 R11.1 U5.5
HV_SDA3: JP4.2 R16.1 U7.5
HV_SDA4: JP5.2 R21.1 U9.5
HV_SDA5: JP6.2 R26.1 U11.5
HV_SDA6: JP7.2 R31.1 U13.5
HV_SDA7: JP8.2 R36.1 U15.5
MSIC_SLP_CLK: U$2.7 U$3.7
MSIC_SLP_CLK1: U$1.7 U$4.7
MSIC_SLP_CLK2: U$5.7 U$6.7
MSIC_SLP_CLK3: U$7.7 U$8.7
MSIC_SLP_CLK4: U$9.7 U$10.7
MSIC_SLP_CLK5: U$11.7 U$12.7
MSIC_SLP_CLK6: U$13.7 U$14.7
MSIC_SLP_CLK7: U$15.7 U$16.7
N$1: R3.1 U2.7 U2.8
N$2: R8.1 U3.7 U3.8
N$3: R13.1 U5.7 U5.8
N$4: R18.1 U7.7 U7.8
N$5: R23.1 U9.7 U9.8
N$6: R28.1 U11.7 U11.8
N$7: R33.1 U13.7 U13.8
N$8: R38.1 U15.7 U15.8
OSC_CLK_OUT: U$2.67 U$3.67
OSC_CLK_OUT1: U$1.67 U$4.67
OSC_CLK_OUT2: U$5.67 U$6.67
OSC_CLK_OUT3: U$7.67 U$8.67
OSC_CLK_OUT4: U$9.67 U$10.67
OSC_CLK_OUT5: U$11.67 U$12.67
OSC_CLK_OUT6: U$13.67 U$14.67
OSC_CLK_OUT7: U$15.67 U$16.67
PSW: U$2.21 U$3.21
PSW1: U$1.21 U$4.21
PSW2: U$5.21 U$6.21
PSW3: U$7.21 U$8.21
PSW4: U$9.21 U$10.21
PSW5: U$11.21 U$12.21
PSW6: U$13.21 U$14.21
PSW7: U$15.21 U$16.21
PWRBTN#: U$2.17 U$3.17
PWRBTN#1: U$1.17 U$4.17
PWRBTN#2: U$5.17 U$6.17
PWRBTN#3: U$7.17 U$8.17
PWRBTN#4: U$9.17 U$10.17
PWRBTN#5: U$11.17 U$12.17
PWRBTN#6: U$13.17 U$14.17
PWRBTN#7: U$15.17 U$16.17
RCVR_MODE: U$2.31 U$3.31
RCVR_MODE1: U$1.31 U$4.31
RCVR_MODE2: U$5.31 U$6.31
RCVR_MODE3: U$7.31 U$8.31
RCVR_MODE4: U$9.31 U$10.31
RCVR_MODE5: U$11.31 U$12.31
RCVR_MODE6: U$13.31 U$14.31
RCVR_MODE7: U$15.31 U$16.31
RESET_OUT#: U$2.36 U$3.36
RESET_OUT#1: U$1.36 U$4.36
RESET_OUT#2: U$5.36 U$6.36
RESET_OUT#3: U$7.36 U$8.36
RESET_OUT#4: U$9.36 U$10.36
RESET_OUT#5: U$11.36 U$12.36
RESET_OUT#6: U$13.36 U$14.36
RESET_OUT#7: U$15.36 U$16.36
USB_DN: U$2.18 U$3.18
USB_DN1: U$1.18 U$4.18
USB_DN2: U$5.18 U$6.18
USB_DN3: U$7.18 U$8.18
USB_DN4: U$9.18 U$10.18
USB_DN5: U$11.18 U$12.18
USB_DN6: U$13.18 U$14.18
USB_DN7: U$15.18 U$16.18
USB_DP: U$2.16 U$3.16
USB_DP1: U$1.16 U$4.16
USB_DP2: U$5.16 U$6.16
USB_DP3: U$7.16 U$8.16
USB_DP4: U$9.16 U$10.16
USB_DP5: U$11.16 U$12.16
USB_DP6: U$13.16 U$14.16
USB_DP7: U$15.16 U$16.16
USB_ID: U$2.3 U$3.3
USB_ID1: U$1.3 U$4.3
USB_ID2: U$5.3 U$6.3
USB_ID3: U$7.3 U$8.3
USB_ID4: U$9.3 U$10.3
USB_ID5: U$11.3 U$12.3
USB_ID6: U$13.3 U$14.3
USB_ID7: U$15.3 U$16.3
USB_VBUS: U$2.20 U$3.20
USB_VBUS1: U$1.20 U$4.20
USB_VBUS2: U$5.20 U$6.20
USB_VBUS3: U$7.20 U$8.20
USB_VBUS4: U$9.20 U$10.20
USB_VBUS5: U$11.20 U$12.20
USB_VBUS6: U$13.20 U$14.20
USB_VBUS7: U$15.20 U$16.20
V_BAT_BKUP: U$2.23 U$3.23
V_BAT_BKUP1: U$1.23 U$4.23
V_BAT_BKUP2: U$5.23 U$6.23
V_BAT_BKUP3: U$7.23 U$8.23
V_BAT_BKUP4: U$9.23 U$10.23
V_BAT_BKUP5: U$11.23 U$12.23
V_BAT_BKUP6: U$13.23 U$14.23
V_BAT_BKUP7: U$15.23 U$16.23
VOUT: C2.1 JP2.3 R1.2 R2.2 R3.2 SJ1.2
VOUT1: C6.1 JP1.3 R6.2 R7.2 R8.2 SJ2.2
VOUT2: C10.1 JP3.3 R11.2 R12.2 R13.2 SJ3.2
VOUT3: C14.1 JP4.3 R16.2 R17.2 R18.2 SJ4.2
VOUT4: C18.1 JP5.3 R21.2 R22.2 R23.2 SJ5.2
VOUT5: C22.1 JP6.3 R26.2 R27.2 R28.2 SJ6.2
VOUT6: C26.1 JP7.3 R31.2 R32.2 R33.2 SJ7.2
VOUT7: C30.1 JP8.3 R36.2 R37.2 R38.2 SJ8.2
VSYS: C3.1 SJ1.1 U1.1 U1.3 U$2.2 U$2.4 U$2.6 U$3.2 U$3.4 U$3.6
VSYS1: C7.1 SJ2.1 U4.1 U4.3 U$1.2 U$1.4 U$1.6 U$4.2 U$4.4 U$4.6
VSYS2: C11.1 SJ3.1 U6.1 U6.3 U$5.2 U$5.4 U$5.6 U$6.2 U$6.4 U$6.6
VSYS3: C15.1 SJ4.1 U8.1 U8.3 U$7.2 U$7.4 U$7.6 U$8.2 U$8.4 U$8.6
VSYS4: C19.1 SJ5.1 U10.1 U10.3 U$9.2 U$9.4 U$9.6 U$10.2 U$10.4 U$10.6
VSYS5: C23.1 SJ6.1 U12.1 U12.3 U$11.2 U$11.4 U$11.6 U$12.2 U$12.4 U$12.6
VSYS6: C27.1 SJ7.1 U14.1 U14.3 U$13.2 U$13.4 U$13.6 U$14.2 U$14.4 U$14.6
VSYS7: C31.1 SJ8.1 U16.1 U16.3 U$15.2 U$15.4 U$15.6 U$16.2 U$16.4 U$16.6

## Tracks (layer width: path | path; a pad name or v marks a point on that pad's centre or on a via)
1.8V  (via drill 0.33)
  Top 0.152: U$3.12 29.13,27.84 v28.12,28.85 27.09,29.88 R5.2
  Top 0.203: U2.1 23.4,33.05 22.95,32.6 C1.1 22.95,30.39 23.46,29.88 R4.2 R5.2
  Bottom 0.152: U$3.12 29.13,27.84 v28.12,28.85
1.8V1  (via drill 0.33)
  Top 0.152: U$4.12 60.12,27.84 v59.11,28.85 58.08,29.88 R10.2
  Top 0.203: U3.1 54.39,33.05 53.94,32.6 C5.1 53.94,30.39 54.44,29.88 R9.2 R10.2
  Bottom 0.152: U$4.12 60.12,27.84 v59.11,28.85
1.8V2  (via drill 0.33)
  Top 0.152: U$6.12 91.11,27.84 v90.09,28.85 89.06,29.88 R15.2
  Top 0.203: U5.1 85.38,33.05 84.92,32.6 C9.1 84.92,30.39 85.43,29.88 R14.2 R15.2
  Bottom 0.152: U$6.12 91.11,27.84 v90.09,28.85
1.8V3  (via drill 0.33)
  Top 0.152: U$8.12 122.1,27.84 v121.08,28.85 120.05,29.88 R20.2
  Top 0.203: U7.1 116.36,33.05 115.91,32.6 C13.1 115.91,30.39 116.42,29.88 R19.2 R20.2
  Bottom 0.152: U$8.12 122.1,27.84 v121.08,28.85
1.8V4  (via drill 0.33)
  Top 0.152: U$10.12 29.13,72.8 v28.12,73.81 27.09,74.84 R25.2
  Top 0.203: U9.1 23.4,78.01 22.95,77.56 C17.1 22.95,75.35 23.46,74.84 R24.2 R25.2
  Bottom 0.152: U$10.12 29.13,72.8 v28.12,73.81
1.8V5  (via drill 0.33)
  Top 0.152: U$12.12 60.12,72.8 v59.11,73.81 58.08,74.84 R30.2
  Top 0.203: U11.1 54.39,78.01 53.94,77.56 C21.1 53.94,75.35 54.44,74.84 R29.2 R30.2
  Bottom 0.152: U$12.12 60.12,72.8 v59.11,73.81
1.8V6  (via drill 0.33)
  Top 0.152: U$14.12 91.11,72.8 v90.09,73.81 89.06,74.84 R35.2
  Top 0.203: U13.1 85.38,78.01 84.92,77.56 C25.1 84.92,75.35 85.43,74.84 R34.2 R35.2
  Bottom 0.152: U$14.12 91.11,72.8 v90.09,73.81
1.8V7  (via drill 0.33)
  Top 0.152: U$16.12 122.1,72.8 v121.08,73.81 120.05,74.84 R40.2
  Top 0.203: U15.1 116.36,78.01 115.91,77.56 C29.1 115.91,75.35 116.42,74.84 R39.2 R40.2
  Bottom 0.152: U$16.12 122.1,72.8 v121.08,73.81
3.3V  (via drill 0.33)
  Top 0.152: v28.04,29.87 29.27,28.64
  Bottom 0.152: 29.34,28.57 v28.04,29.87 | U$3.8
  pour Top (isolate 0.051): 28.83,28.7 30.61,28.7 30.61,28.07 28.83,28.07
  pour Bottom (isolate 0.051): 28.83,28.7 28.83,28.07 30.48,28.07 30.48,28.7
3.3V1  (via drill 0.33)
  Top 0.152: v59.03,29.87 60.26,28.64
  Bottom 0.152: 60.33,28.57 v59.03,29.87 | U$4.8
  pour Top (isolate 0.051): 59.82,28.7 61.59,28.7 61.59,28.07 59.82,28.07
  pour Bottom (isolate 0.051): 59.82,28.7 59.82,28.07 61.47,28.07 61.47,28.7
3.3V2  (via drill 0.33)
  Top 0.152: v90.02,29.87 91.25,28.64
  Bottom 0.152: 91.31,28.57 v90.02,29.87 | U$6.8
  pour Top (isolate 0.051): 90.81,28.7 92.58,28.7 92.58,28.07 90.81,28.07
  pour Bottom (isolate 0.051): 90.81,28.7 90.81,28.07 92.46,28.07 92.46,28.7
3.3V3  (via drill 0.33)
  Top 0.152: v121.01,29.87 122.24,28.64
  Bottom 0.152: 122.3,28.57 v121.01,29.87 | U$8.8
  pour Top (isolate 0.051): 121.79,28.7 123.57,28.7 123.57,28.07 121.79,28.07
  pour Bottom (isolate 0.051): 121.79,28.7 121.79,28.07 123.44,28.07 123.44,28.7
3.3V4  (via drill 0.33)
  Top 0.152: v28.04,74.83 29.27,73.6
  Bottom 0.152: 29.34,73.53 v28.04,74.83 | U$10.8
  pour Top (isolate 0.051): 28.83,73.66 30.61,73.66 30.61,73.03 28.83,73.03
  pour Bottom (isolate 0.051): 28.83,73.66 28.83,73.03 30.48,73.03 30.48,73.66
3.3V5  (via drill 0.33)
  Top 0.152: v59.03,74.83 60.26,73.6
  Bottom 0.152: 60.33,73.53 v59.03,74.83 | U$12.8
  pour Top (isolate 0.051): 59.82,73.66 61.59,73.66 61.59,73.03 59.82,73.03
  pour Bottom (isolate 0.051): 59.82,73.66 59.82,73.03 61.47,73.03 61.47,73.66
3.3V6  (via drill 0.33)
  Top 0.152: v90.02,74.83 91.25,73.6
  Bottom 0.152: 91.31,73.53 v90.02,74.83 | U$14.8
  pour Top (isolate 0.051): 90.81,73.66 92.58,73.66 92.58,73.03 90.81,73.03
  pour Bottom (isolate 0.051): 90.81,73.66 90.81,73.03 92.46,73.03 92.46,73.66
3.3V7  (via drill 0.33)
  Top 0.152: v121.01,74.83 122.24,73.6
  Bottom 0.152: 122.3,73.53 v121.01,74.83 | U$16.8
  pour Top (isolate 0.051): 121.79,73.66 123.57,73.66 123.57,73.03 121.79,73.03
  pour Bottom (isolate 0.051): 121.79,73.66 121.79,73.03 123.44,73.03 123.44,73.66
3.3V-REGULATED
  Top 0.203: 18,27.82 U1.5
  pour Top (rank 2): 18.41,26.92 15.11,26.92 15.11,28.7 17.14,30.73 18.54,30.73 18.54,27.05
3.3V-REGULATED1
  Top 0.203: 48.99,27.82 U4.5
  pour Top (rank 2): 49.4,26.92 46.1,26.92 46.1,28.7 48.13,30.73 49.53,30.73 49.53,27.05
3.3V-REGULATED2
  Top 0.203: 79.98,27.82 U6.5
  pour Top (rank 2): 80.39,26.92 77.09,26.92 77.09,28.7 79.12,30.73 80.52,30.73 80.52,27.05
3.3V-REGULATED3
  Top 0.203: 110.96,27.82 U8.5
  pour Top (rank 2): 111.38,26.92 108.08,26.92 108.08,28.7 110.11,30.73 111.51,30.73 111.51,27.05
3.3V-REGULATED4
  Top 0.203: 18,72.77 U10.5
  pour Top (rank 2): 18.41,71.88 15.11,71.88 15.11,73.66 17.14,75.69 18.54,75.69 18.54,72.01
3.3V-REGULATED5
  Top 0.203: 48.99,72.77 U12.5
  pour Top (rank 2): 49.4,71.88 46.1,71.88 46.1,73.66 48.13,75.69 49.53,75.69 49.53,72.01
3.3V-REGULATED6
  Top 0.203: 79.98,72.77 U14.5
  pour Top (rank 2): 80.39,71.88 77.09,71.88 77.09,73.66 79.12,75.69 80.52,75.69 80.52,72.01
3.3V-REGULATED7
  Top 0.203: 110.96,72.77 U16.5
  pour Top (rank 2): 111.38,71.88 108.08,71.88 108.08,73.66 110.11,75.69 111.51,75.69 111.51,72.01
DCIN  (via drill 0.33)
  Top 0.152: U$3.14 28.98,27.44 28.3,28.12 27.86,28.12 27.1,28.88 v27.05,28.88
  Bottom 0.152: U$3.14 28.98,27.44 28.3,28.12 27.86,28.12 27.1,28.88 v27.05,28.88
DCIN1  (via drill 0.33)
  Top 0.152: U$4.14 59.96,27.44 59.28,28.12 58.85,28.12 58.09,28.88 v58.04,28.88
  Bottom 0.152: U$4.14 59.96,27.44 59.28,28.12 58.85,28.12 58.09,28.88 v58.04,28.88
DCIN2  (via drill 0.33)
  Top 0.152: U$6.14 90.95,27.44 90.27,28.12 89.84,28.12 89.08,28.88 v89.03,28.88
  Bottom 0.152: U$6.14 90.95,27.44 90.27,28.12 89.84,28.12 89.08,28.88 v89.03,28.88
DCIN3  (via drill 0.33)
  Top 0.152: U$8.14 121.94,27.44 121.26,28.12 120.83,28.12 120.07,28.88 v120.02,28.88
  Bottom 0.152: U$8.14 121.94,27.44 121.26,28.12 120.83,28.12 120.07,28.88 v120.02,28.88
DCIN4  (via drill 0.33)
  Top 0.152: U$10.14 28.98,72.4 28.3,73.08 27.86,73.08 27.1,73.84 v27.05,73.84
  Bottom 0.152: U$10.14 28.98,72.4 28.3,73.08 27.86,73.08 27.1,73.84 v27.05,73.84
DCIN5  (via drill 0.33)
  Top 0.152: U$12.14 59.96,72.4 59.28,73.08 58.85,73.08 58.09,73.84 v58.04,73.84
  Bottom 0.152: U$12.14 59.96,72.4 59.28,73.08 58.85,73.08 58.09,73.84 v58.04,73.84
DCIN6  (via drill 0.33)
  Top 0.152: U$14.14 90.95,72.4 90.27,73.08 89.84,73.08 89.08,73.84 v89.03,73.84
  Bottom 0.152: U$14.14 90.95,72.4 90.27,73.08 89.84,73.08 89.08,73.84 v89.03,73.84
DCIN7  (via drill 0.33)
  Top 0.152: U$16.14 121.94,72.4 121.26,73.08 120.83,73.08 120.07,73.84 v120.02,73.84
  Bottom 0.152: U$16.14 121.94,72.4 121.26,73.08 120.83,73.08 120.07,73.84 v120.02,73.84
FAULT  (via drill 0.33)
  Top 0.152: U$3.19 33.6,26.24 33.78,26.42 34.59,26.42 34.9,26.72 35.41,26.72 v36.07,27.38
  Bottom 0.152: v36.07,27.38 35.41,26.72 34.9,26.72 34.59,26.42 33.78,26.42 33.6,26.24 U$3.19
FAULT1  (via drill 0.33)
  Top 0.152: U$4.19 64.59,26.24 64.77,26.42 65.58,26.42 65.89,26.72 66.4,26.72 v67.06,27.38
  Bottom 0.152: v67.06,27.38 66.4,26.72 65.89,26.72 65.58,26.42 64.77,26.42 64.59,26.24 U$4.19
FAULT2  (via drill 0.33)
  Top 0.152: U$6.19 95.58,26.24 95.76,26.42 96.57,26.42 96.88,26.72 97.38,26.72 v98.04,27.38
  Bottom 0.152: v98.04,27.38 97.38,26.72 96.88,26.72 96.57,26.42 95.76,26.42 95.58,26.24 U$6.19
FAULT3  (via drill 0.33)
  Top 0.152: U$8.19 126.57,26.24 126.75,26.42 127.56,26.42 127.86,26.72 128.37,26.72 v129.03,27.38
  Bottom 0.152: v129.03,27.38 128.37,26.72 127.86,26.72 127.56,26.42 126.75,26.42 126.57,26.24 U$8.19
FAULT4  (via drill 0.33)
  Top 0.152: U$10.19 33.6,71.2 33.78,71.37 34.59,71.37 34.9,71.68 35.41,71.68 v36.07,72.34
  Bottom 0.152: v36.07,72.34 35.41,71.68 34.9,71.68 34.59,71.37 33.78,71.37 33.6,71.2 U$10.19
FAULT5  (via drill 0.33)
  Top 0.152: U$12.19 64.59,71.2 64.77,71.37 65.58,71.37 65.89,71.68 66.4,71.68 v67.06,72.34
  Bottom 0.152: v67.06,72.34 66.4,71.68 65.89,71.68 65.58,71.37 64.77,71.37 64.59,71.2 U$12.19
FAULT6  (via drill 0.33)
  Top 0.152: U$14.19 95.58,71.2 95.76,71.37 96.57,71.37 96.88,71.68 97.38,71.68 v98.04,72.34
  Bottom 0.152: v98.04,72.34 97.38,71.68 96.88,71.68 96.57,71.37 95.76,71.37 95.58,71.2 U$14.19
FAULT7  (via drill 0.33)
  Top 0.152: U$16.19 126.57,71.2 126.75,71.37 127.56,71.37 127.86,71.68 128.37,71.68 v129.03,72.34
  Bottom 0.152: v129.03,72.34 128.37,71.68 127.86,71.68 127.56,71.37 126.75,71.37 126.57,71.2 U$16.19
FW_RCVR  (via drill 0.33)
  Top 0.152: v33.35,15.16 33.76,15.57 33.76,16.1 33.62,16.24 U$3.69
  Bottom 0.152: U$3.69 33.62,16.24 33.76,16.1 33.76,15.57 v33.35,15.16
FW_RCVR1  (via drill 0.33)
  Top 0.152: v64.34,15.16 64.75,15.57 64.75,16.1 64.61,16.24 U$4.69
  Bottom 0.152: U$4.69 64.61,16.24 64.75,16.1 64.75,15.57 v64.34,15.16
FW_RCVR2  (via drill 0.33)
  Top 0.152: v95.33,15.16 95.73,15.57 95.73,16.1 95.6,16.24 U$6.69
  Bottom 0.152: U$6.69 95.6,16.24 95.73,16.1 95.73,15.57 v95.33,15.16
FW_RCVR3  (via drill 0.33)
  Top 0.152: v126.31,15.16 126.72,15.57 126.72,16.1 126.59,16.24 U$8.69
  Bottom 0.152: U$8.69 126.59,16.24 126.72,16.1 126.72,15.57 v126.31,15.16
FW_RCVR4  (via drill 0.33)
  Top 0.152: v33.35,60.12 33.76,60.53 33.76,61.06 33.62,61.2 U$10.69
  Bottom 0.152: U$10.69 33.62,61.2 33.76,61.06 33.76,60.53 v33.35,60.12
FW_RCVR5  (via drill 0.33)
  Top 0.152: v64.34,60.12 64.75,60.53 64.75,61.06 64.61,61.2 U$12.69
  Bottom 0.152: U$12.69 64.61,61.2 64.75,61.06 64.75,60.53 v64.34,60.12
FW_RCVR6  (via drill 0.33)
  Top 0.152: v95.33,60.12 95.73,60.53 95.73,61.06 95.6,61.2 U$14.69
  Bottom 0.152: U$14.69 95.6,61.2 95.73,61.06 95.73,60.53 v95.33,60.12
FW_RCVR7  (via drill 0.33)
  Top 0.152: v126.31,60.12 126.72,60.53 126.72,61.06 126.59,61.2 U$16.69
  Bottom 0.152: U$16.69 126.59,61.2 126.72,61.06 126.72,60.53 v126.31,60.12
GND  (via drill 0.33, 0.51)
  other vias: 33.99,27.38 35.1,29.03 25.15,34.8
  pour Bottom (isolate 0.051, rank 6): 37.34,49.53 37.34,8.64 arc-90 35.56,6.86 8.64,6.86 arc-90 6.86,8.64 6.86,49.53 arc-90 8.64,51.31 35.56,51.31 arc-90
  pour Top (isolate 0.051, rank 6): 37.34,8.59 arc-90 35.61,6.86 8.64,6.86 arc-90 6.86,8.64 6.86,49.53 arc-90 8.64,51.31 35.56,51.31 arc-90 37.34,49.53
GND1  (via drill 0.33, 0.51)
  other vias: 64.97,27.38 66.09,29.03 56.13,34.8
  pour Bottom (isolate 0.051, rank 6): 68.33,49.53 68.33,8.64 arc-90 66.55,6.86 39.62,6.86 arc-90 37.85,8.64 37.85,49.53 arc-90 39.62,51.31 66.55,51.31 arc-90
  pour Top (isolate 0.051, rank 6): 68.33,8.59 arc-90 66.6,6.86 39.62,6.86 arc-90 37.85,8.64 37.85,49.53 arc-90 39.62,51.31 66.55,51.31 arc-90 68.33,49.53
GND2  (via drill 0.33, 0.51)
  other vias: 95.96,27.38 97.08,29.03 87.12,34.8
  pour Bottom (isolate 0.051, rank 6): 99.31,49.53 99.31,8.64 arc-90 97.54,6.86 70.61,6.86 arc-90 68.83,8.64 68.83,49.53 arc-90 70.61,51.31 97.54,51.31 arc-90
  pour Top (isolate 0.051, rank 6): 99.31,8.59 arc-90 97.59,6.86 70.61,6.86 arc-90 68.83,8.64 68.83,49.53 arc-90 70.61,51.31 97.54,51.31 arc-90 99.31,49.53
GND3  (via drill 0.33, 0.51)
  other vias: 126.95,27.38 128.07,29.03 118.11,34.8
  pour Bottom (isolate 0.051, rank 6): 130.3,49.53 130.3,8.64 arc-90 128.52,6.86 101.6,6.86 arc-90 99.82,8.64 99.82,49.53 arc-90 101.6,51.31 128.52,51.31 arc-90
  pour Top (isolate 0.051, rank 6): 130.3,8.59 arc-90 128.57,6.86 101.6,6.86 arc-90 99.82,8.64 99.82,49.53 arc-90 101.6,51.31 128.52,51.31 arc-90 130.3,49.53
GND4  (via drill 0.33, 0.51)
  other vias: 33.99,72.34 35.1,73.99 25.15,79.76
  pour Bottom (isolate 0.051, rank 6): 37.34,94.49 37.34,53.59 arc-90 35.56,51.82 8.64,51.82 arc-90 6.86,53.59 6.86,94.49 arc-90 8.64,96.27 35.56,96.27 arc-90
  pour Top (isolate 0.051, rank 6): 37.34,53.54 arc-90 35.61,51.82 8.64,51.82 arc-90 6.86,53.59 6.86,94.49 arc-90 8.64,96.27 35.56,96.27 arc-90 37.34,94.49
GND5  (via drill 0.33, 0.51)
  other vias: 64.97,72.34 66.09,73.99 56.13,79.76
  pour Bottom (isolate 0.051, rank 6): 68.33,94.49 68.33,53.59 arc-90 66.55,51.82 39.62,51.82 arc-90 37.85,53.59 37.85,94.49 arc-90 39.62,96.27 66.55,96.27 arc-90
  pour Top (isolate 0.051, rank 6): 68.33,53.54 arc-90 66.6,51.82 39.62,51.82 arc-90 37.85,53.59 37.85,94.49 arc-90 39.62,96.27 66.55,96.27 arc-90 68.33,94.49
GND6  (via drill 0.33, 0.51)
  other vias: 95.96,72.34 97.08,73.99 87.12,79.76
  pour Bottom (isolate 0.051, rank 6): 99.31,94.49 99.31,53.59 arc-90 97.54,51.82 70.61,51.82 arc-90 68.83,53.59 68.83,94.49 arc-90 70.61,96.27 97.54,96.27 arc-90
  pour Top (isolate 0.051, rank 6): 99.31,53.54 arc-90 97.59,51.82 70.61,51.82 arc-90 68.83,53.59 68.83,94.49 arc-90 70.61,96.27 97.54,96.27 arc-90 99.31,94.49
GND7  (via drill 0.33, 0.51)
  other vias: 126.95,72.34 128.07,73.99 118.11,79.76
  pour Bottom (isolate 0.051, rank 6): 130.3,94.49 130.3,53.59 arc-90 128.52,51.82 101.6,51.82 arc-90 99.82,53.59 99.82,94.49 arc-90 101.6,96.27 128.52,96.27 arc-90
  pour Top (isolate 0.051, rank 6): 130.3,53.54 arc-90 128.57,51.82 101.6,51.82 arc-90 99.82,53.59 99.82,94.49 arc-90 101.6,96.27 128.52,96.27 arc-90 130.3,94.49
GP1  (via drill 0.33)
  Top 0.152: v59.11,20.62 59.12,20.64 U$4.48
  Bottom 0.152: U$4.48 59.12,20.64 v59.11,20.62
GP2  (via drill 0.33)
  Top 0.152: U$4.42 60.2,21.84 v60.02,22.02
  Bottom 0.152: v60.02,22.02 60.2,21.84 U$4.42
GP3  (via drill 0.33)
  Top 0.152: U$4.34 60.06,23.44 59.54,22.91 58.98,22.91 58.4,23.5 57.78,23.5 v57.51,23.77
  Bottom 0.152: v57.51,23.77 57.78,23.5 58.4,23.5 58.98,22.91 59.54,22.91 60.06,23.44 U$4.34
GP4  (via drill 0.33)
  Top 0.152: v59.26,23.57 59.52,23.84 U$4.32
  Bottom 0.152: U$4.32 59.52,23.84 v59.26,23.57
GP5  (via drill 0.33)
  Top 0.152: U$4.30 60.28,24.24 60.27,24.23 58.52,24.23 v58.45,24.16
  Bottom 0.152: v58.45,24.16 58.52,24.23 60.27,24.23 60.28,24.24 U$4.30
GP6  (via drill 0.33)
  Top 0.152: U$4.28 60.25,24.64 60.15,24.54 59,24.54 58.7,24.84 57.71,24.84 v57.66,24.79
  Bottom 0.152: v57.66,24.79 57.71,24.84 58.7,24.84 59,24.54 60.15,24.54 60.25,24.64 U$4.28
GP7  (via drill 0.33)
  Top 0.152: v57.58,25.81 58.24,25.15 58.83,25.15 59.13,24.84 60.02,24.84 60.22,25.04 U$4.26
  Bottom 0.152: U$4.26 60.22,25.04 60.02,24.84 59.13,24.84 58.83,25.15 58.24,25.15 v57.58,25.81
GP8  (via drill 0.33)
  Top 0.152: v65.33,25.15 65.22,25.04 U$4.25
  Bottom 0.152: U$4.25 65.22,25.04 v65.33,25.15
GP9  (via drill 0.33)
  Top 0.152: U$4.24 60.19,25.44 59.89,25.15 59.26,25.15 v58.6,25.81
  Bottom 0.152: v58.6,25.81 59.26,25.15 59.89,25.15 60.19,25.44 U$4.24
GP10  (via drill 0.33)
  Top 0.152: v90.09,20.62 90.11,20.64 U$6.48
  Bottom 0.152: U$6.48 90.11,20.64 v90.09,20.62
GP11  (via drill 0.33)
  Top 0.152: U$6.42 91.19,21.84 v91.01,22.02
  Bottom 0.152: v91.01,22.02 91.19,21.84 U$6.42
GP12  (via drill 0.33)
  Top 0.152: U$6.34 91.05,23.44 90.53,22.91 89.97,22.91 89.38,23.5 88.77,23.5 v88.49,23.77
  Bottom 0.152: v88.49,23.77 88.77,23.5 89.38,23.5 89.97,22.91 90.53,22.91 91.05,23.44 U$6.34
GP12_PWM0  (via drill 0.33)
  Top 0.152: U$3.35 33.5,23.04 33.68,23.22 v34.19,23.22
  Bottom 0.152: v34.19,23.22 33.68,23.22 33.5,23.04 U$3.35 | U$3.35
GP12_PWM1  (via drill 0.33)
  Top 0.152: U$4.35 64.49,23.04 64.67,23.22 v65.18,23.22
  Bottom 0.152: v65.18,23.22 64.67,23.22 64.49,23.04 U$4.35 | U$4.35
GP12_PWM2  (via drill 0.33)
  Top 0.152: U$6.35 95.48,23.04 95.66,23.22 v96.16,23.22
  Bottom 0.152: v96.16,23.22 95.66,23.22 95.48,23.04 U$6.35 | U$6.35
GP12_PWM3  (via drill 0.33)
  Top 0.152: U$8.35 126.47,23.04 126.64,23.22 v127.15,23.22
  Bottom 0.152: v127.15,23.22 126.64,23.22 126.47,23.04 U$8.35 | U$8.35
GP12_PWM4  (via drill 0.33)
  Top 0.152: U$10.35 33.5,68 33.68,68.17 v34.19,68.17
  Bottom 0.152: v34.19,68.17 33.68,68.17 33.5,68 U$10.35 | U$10.35
GP12_PWM5  (via drill 0.33)
  Top 0.152: U$12.35 64.49,68 64.67,68.17 v65.18,68.17
  Bottom 0.152: v65.18,68.17 64.67,68.17 64.49,68 U$12.35 | U$12.35
GP12_PWM6  (via drill 0.33)
  Top 0.152: U$14.35 95.48,68 95.66,68.17 v96.16,68.17
  Bottom 0.152: v96.16,68.17 95.66,68.17 95.48,68 U$14.35 | U$14.35
GP12_PWM7  (via drill 0.33)
  Top 0.152: U$16.35 126.47,68 126.64,68.17 v127.15,68.17
  Bottom 0.152: v127.15,68.17 126.64,68.17 126.47,68 U$16.35 | U$16.35
GP13  (via drill 0.33)
  Top 0.152: v90.25,23.57 90.51,23.84 U$6.32
  Bottom 0.152: U$6.32 90.51,23.84 v90.25,23.57
GP13_PWM1  (via drill 0.33)
  Top 0.152: v36.5,24.43 36.47,24.43 35.79,23.75 35.26,23.75 35.13,23.88 33.91,23.88 33.47,23.44 U$3.33
  Bottom 0.152: U$3.33 33.47,23.44 33.91,23.88 35.13,23.88 35.26,23.75 35.79,23.75 36.47,24.43 v36.5,24.43
GP13_PWM2  (via drill 0.33)
  Top 0.152: v67.49,24.43 67.46,24.43 66.78,23.75 66.24,23.75 66.12,23.88 64.9,23.88 64.46,23.44 U$4.33
  Bottom 0.152: U$4.33 64.46,23.44 64.9,23.88 66.12,23.88 66.24,23.75 66.78,23.75 67.46,24.43 v67.49,24.43
GP13_PWM3  (via drill 0.33)
  Top 0.152: v98.48,24.43 98.45,24.43 97.77,23.75 97.23,23.75 97.1,23.88 95.89,23.88 95.45,23.44 U$6.33
  Bottom 0.152: U$6.33 95.45,23.44 95.89,23.88 97.1,23.88 97.23,23.75 97.77,23.75 98.45,24.43 v98.48,24.43
GP13_PWM4  (via drill 0.33)
  Top 0.152: v129.46,24.43 129.44,24.43 128.75,23.75 128.22,23.75 128.09,23.88 126.87,23.88 126.44,23.44 U$8.33
  Bottom 0.152: U$8.33 126.44,23.44 126.87,23.88 128.09,23.88 128.22,23.75 128.75,23.75 129.44,24.43 v129.46,24.43
GP13_PWM5  (via drill 0.33)
  Top 0.152: v36.5,69.39 36.47,69.39 35.79,68.71 35.26,68.71 35.13,68.83 33.91,68.83 33.47,68.4 U$10.33
  Bottom 0.152: U$10.33 33.47,68.4 33.91,68.83 35.13,68.83 35.26,68.71 35.79,68.71 36.47,69.39 v36.5,69.39
GP13_PWM6  (via drill 0.33)
  Top 0.152: v67.49,69.39 67.46,69.39 66.78,68.71 66.24,68.71 66.12,68.83 64.9,68.83 64.46,68.4 U$12.33
  Bottom 0.152: U$12.33 64.46,68.4 64.9,68.83 66.12,68.83 66.24,68.71 66.78,68.71 67.46,69.39 v67.49,69.39
GP13_PWM7  (via drill 0.33)
  Top 0.152: v98.48,69.39 98.45,69.39 97.77,68.71 97.23,68.71 97.1,68.83 95.89,68.83 95.45,68.4 U$14.33
  Bottom 0.152: U$14.33 95.45,68.4 95.89,68.83 97.1,68.83 97.23,68.71 97.77,68.71 98.45,69.39 v98.48,69.39
GP13_PWM8  (via drill 0.33)
  Top 0.152: v129.46,69.39 129.44,69.39 128.75,68.71 128.22,68.71 128.09,68.83 126.87,68.83 126.44,68.4 U$16.33
  Bottom 0.152: U$16.33 126.44,68.4 126.87,68.83 128.09,68.83 128.22,68.71 128.75,68.71 129.44,69.39 v129.46,69.39
GP14  (via drill 0.33)
  Top 0.152: v28.12,20.62 28.13,20.64 U$3.48
  Bottom 0.152: U$3.48 28.13,20.64 v28.12,20.62
GP15  (via drill 0.33)
  Top 0.152: U$3.42 29.22,21.84 v29.03,22.02
  Bottom 0.152: v29.03,22.02 29.22,21.84 U$3.42
GP16  (via drill 0.33)
  Top 0.152: U$6.30 91.27,24.24 91.26,24.23 89.51,24.23 v89.43,24.16
  Bottom 0.152: v89.43,24.16 89.51,24.23 91.26,24.23 91.27,24.24 U$6.30
GP17  (via drill 0.33)
  Top 0.152: U$6.28 91.24,24.64 91.14,24.54 89.99,24.54 89.69,24.84 88.7,24.84 v88.65,24.79
  Bottom 0.152: v88.65,24.79 88.7,24.84 89.69,24.84 89.99,24.54 91.14,24.54 91.24,24.64 U$6.28
GP18  (via drill 0.33)
  Top 0.152: v88.57,25.81 89.23,25.15 89.81,25.15 90.12,24.84 91.01,24.84 91.2,25.04 U$6.26